# EAGLE board RP2040_Thing_Plus-Panel (EAGLE 9.6.2), part 1 of 6
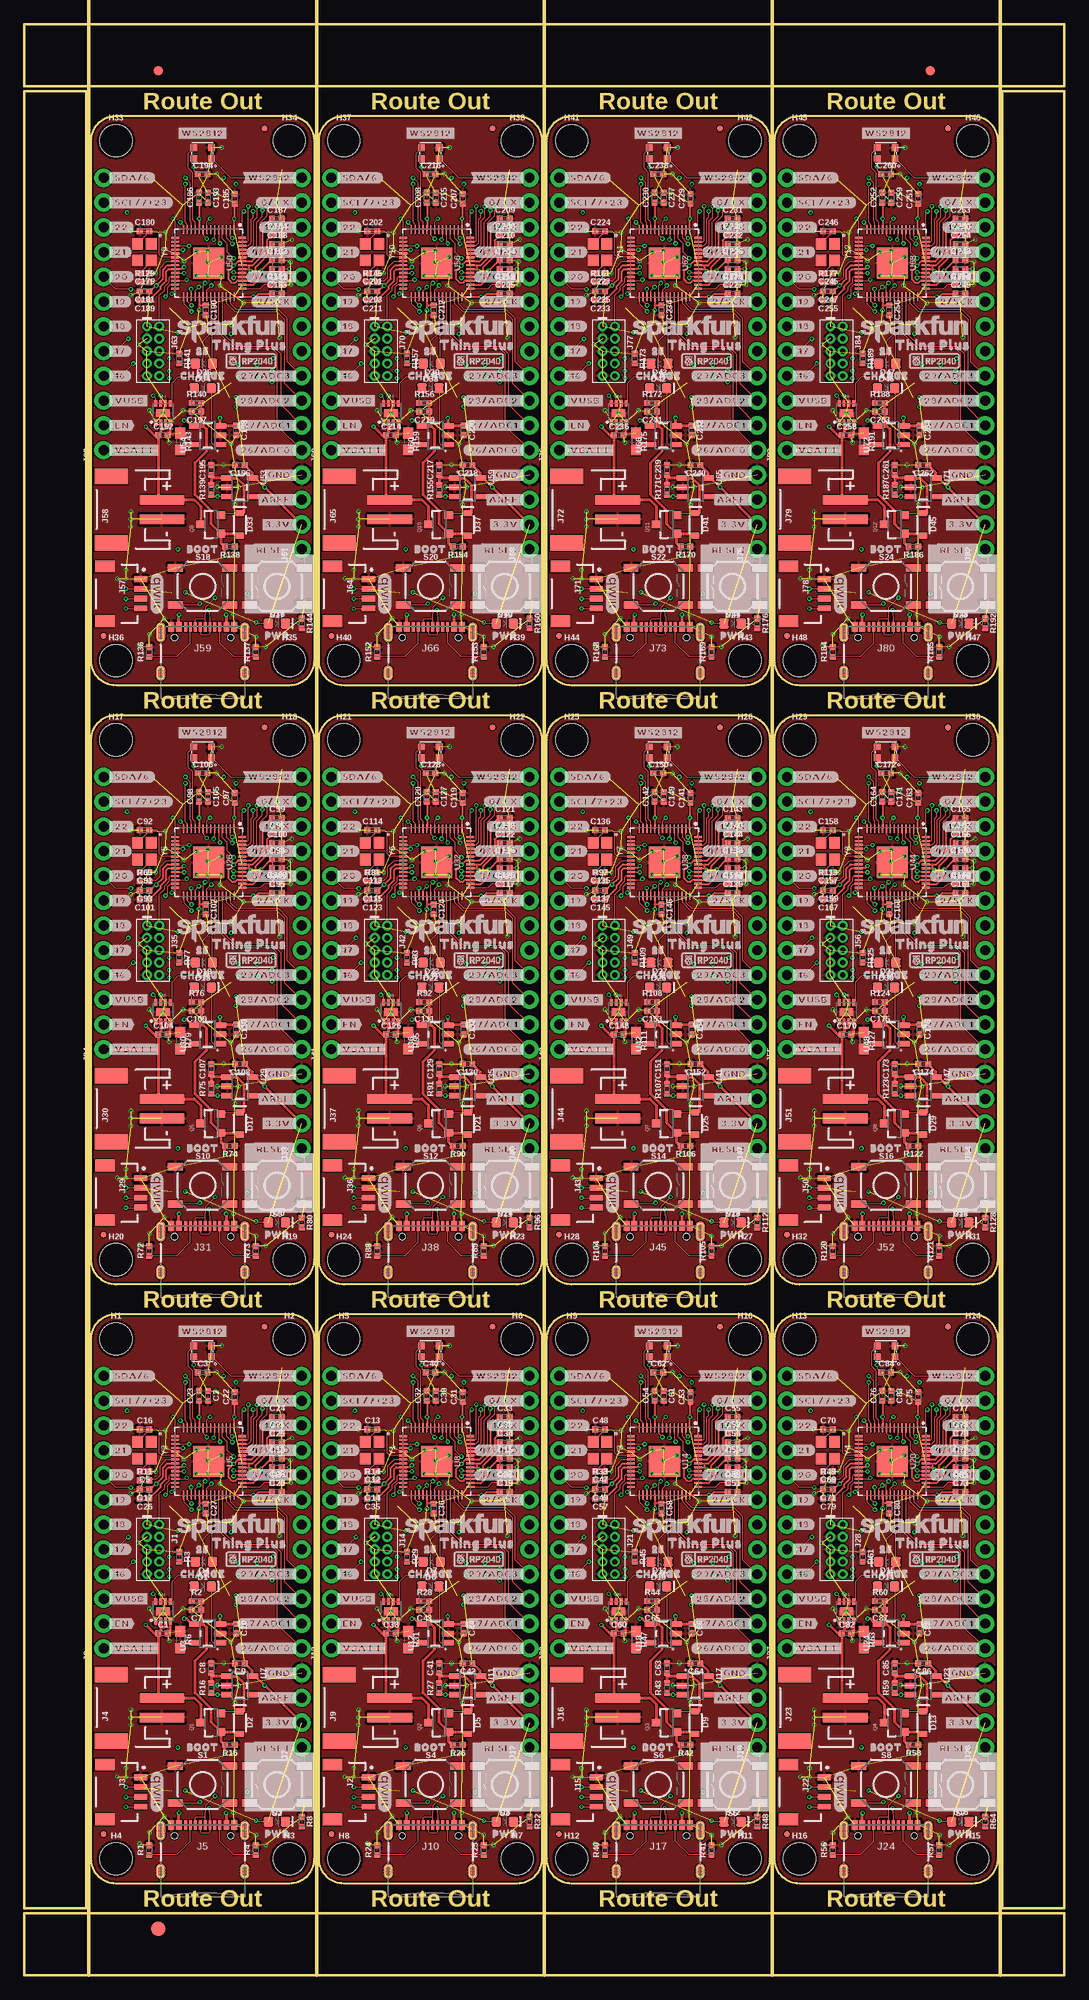
[diagram p0: board, top side]
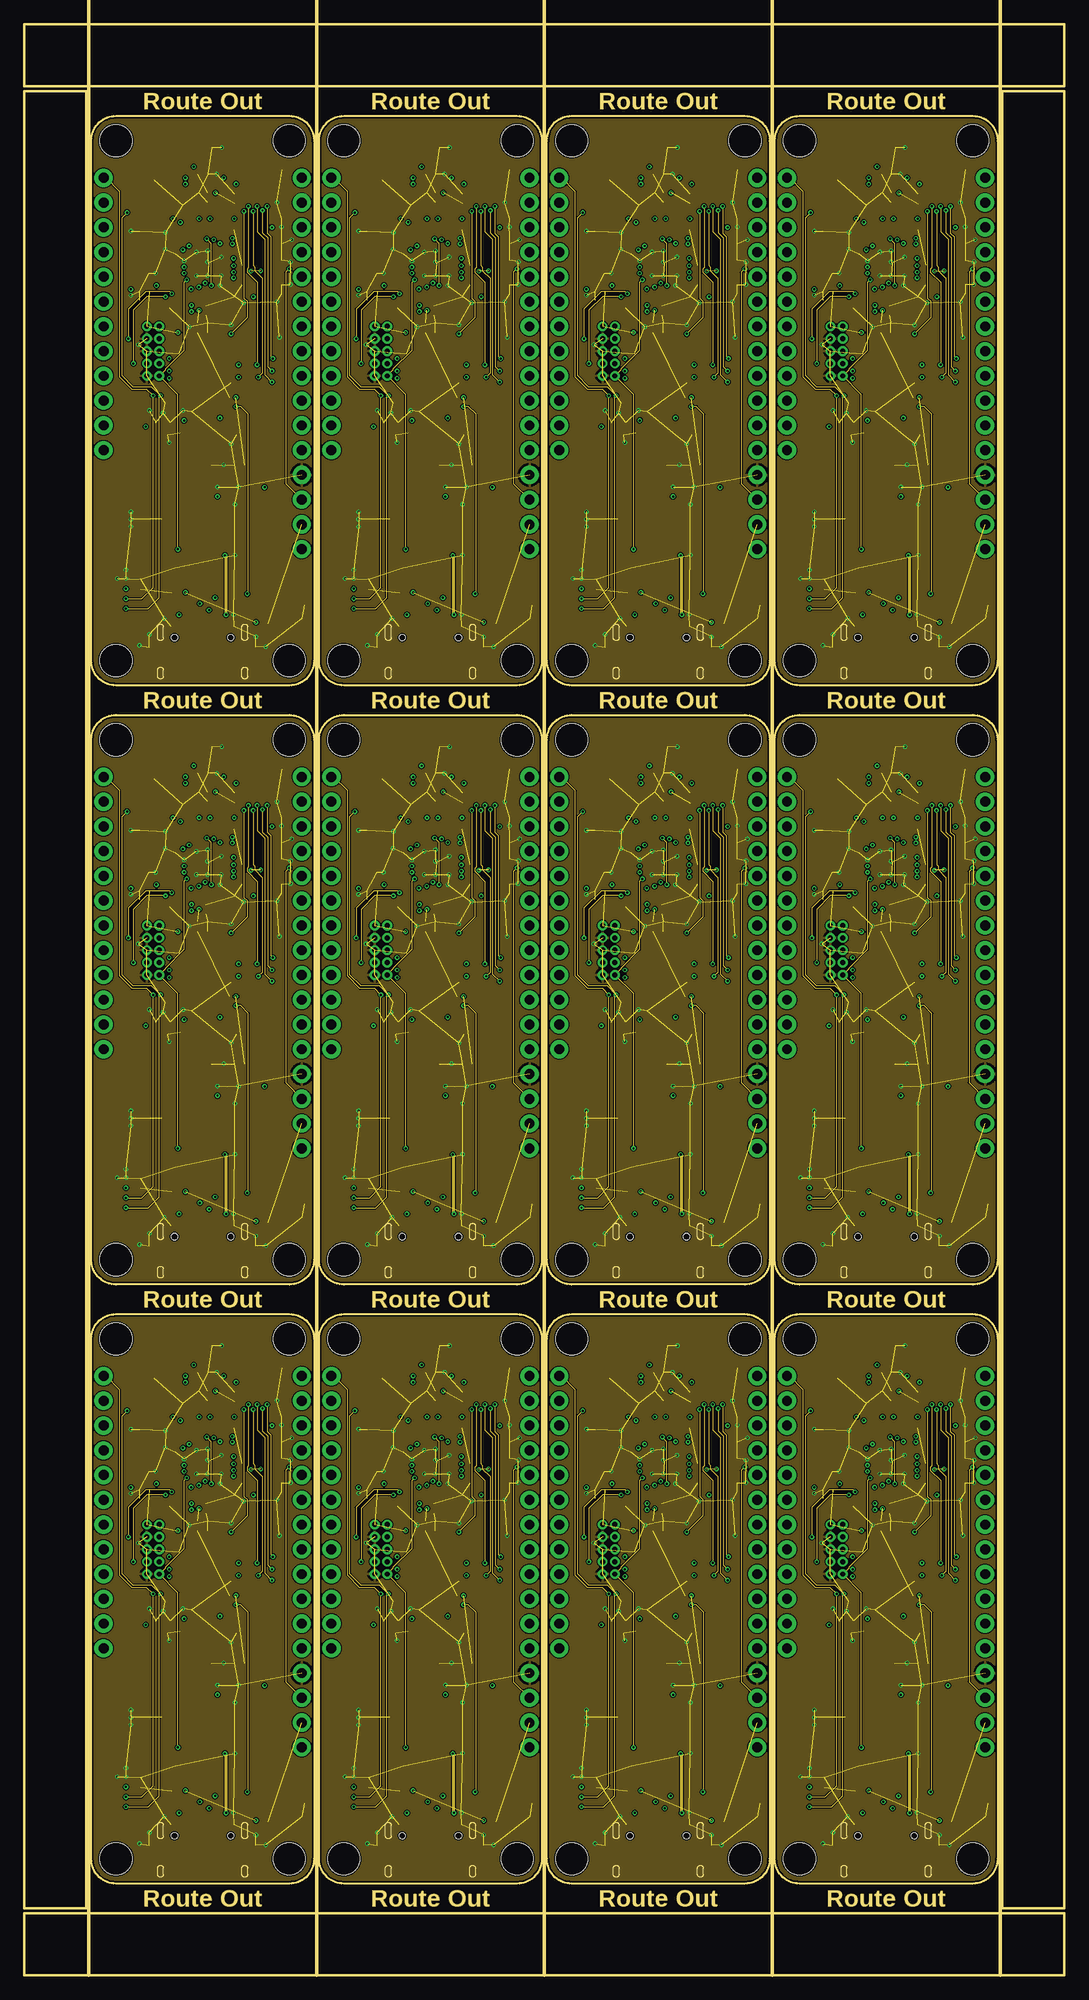
[diagram p1: board, inner layer Route2]
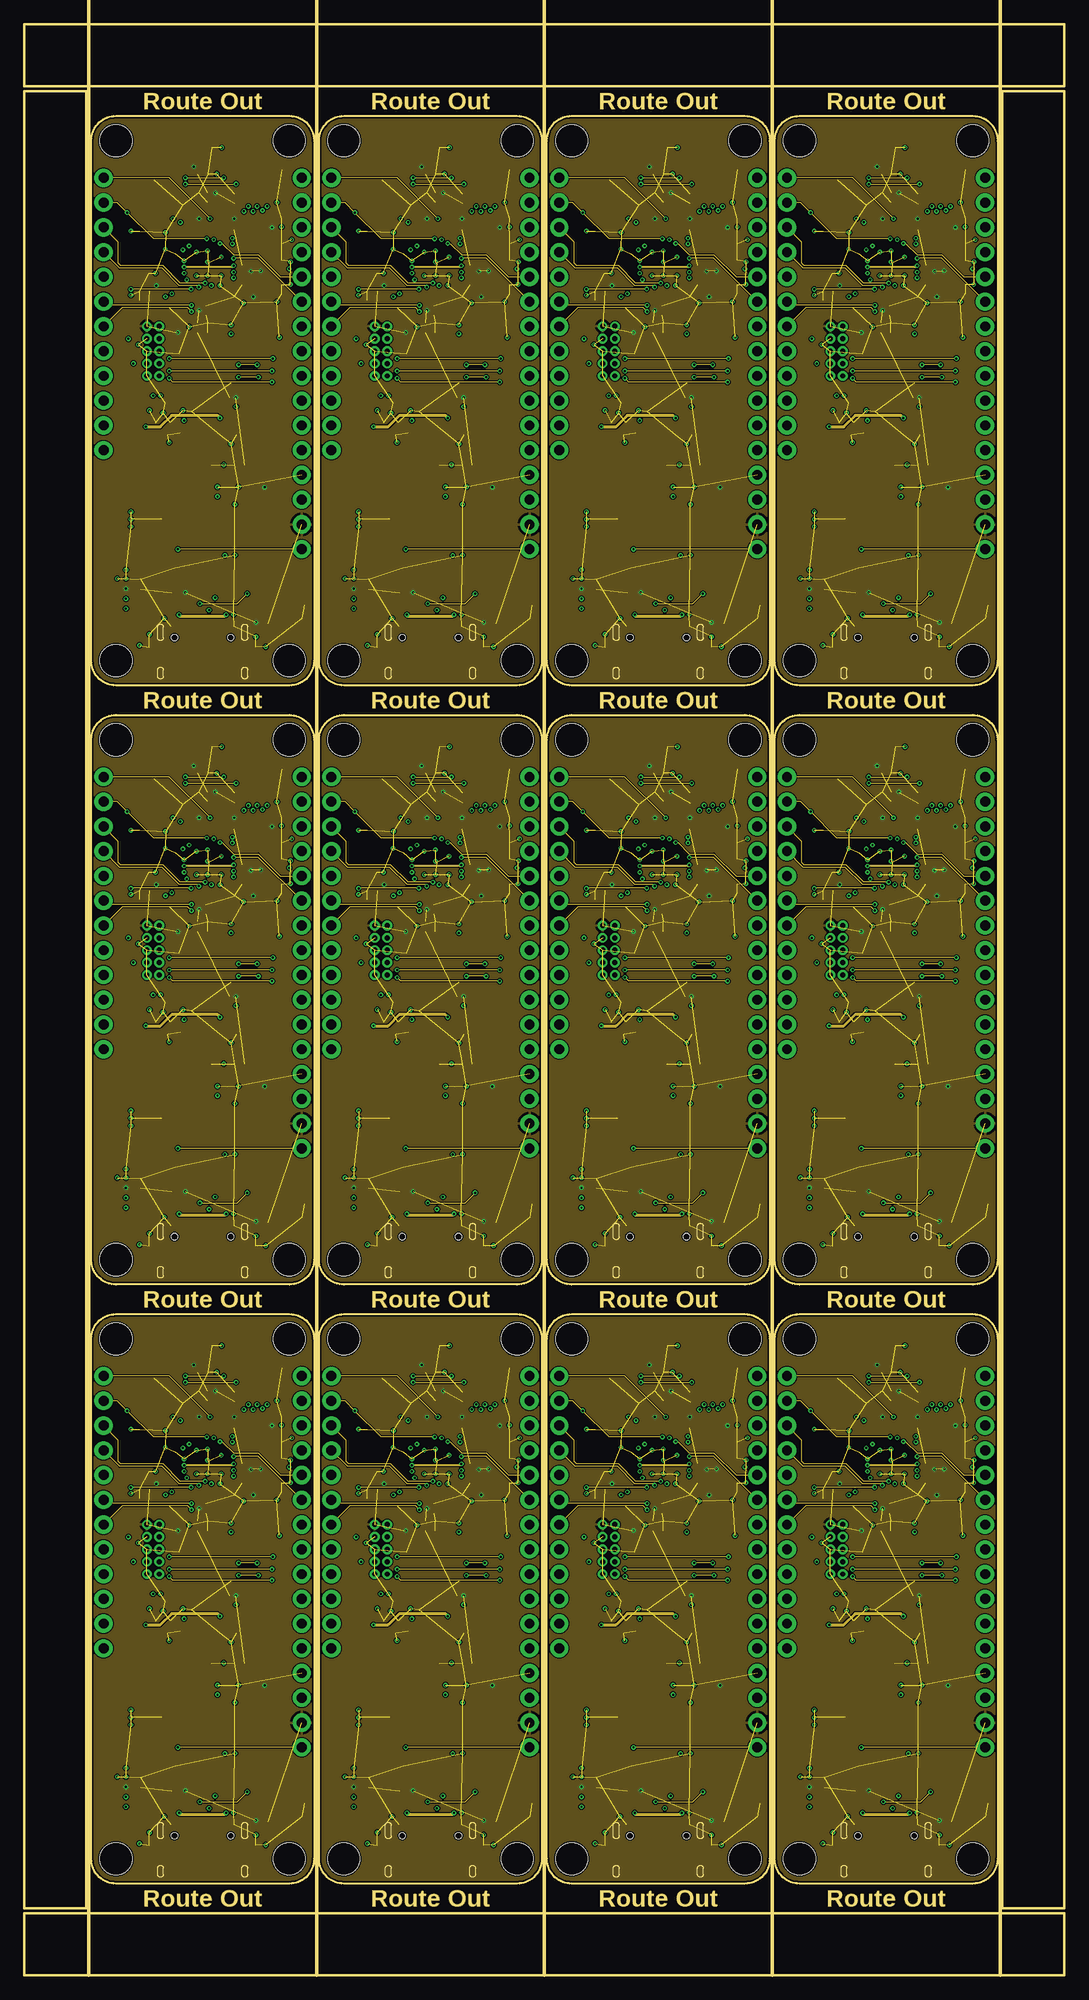
[diagram p2: board, inner layer Route15]
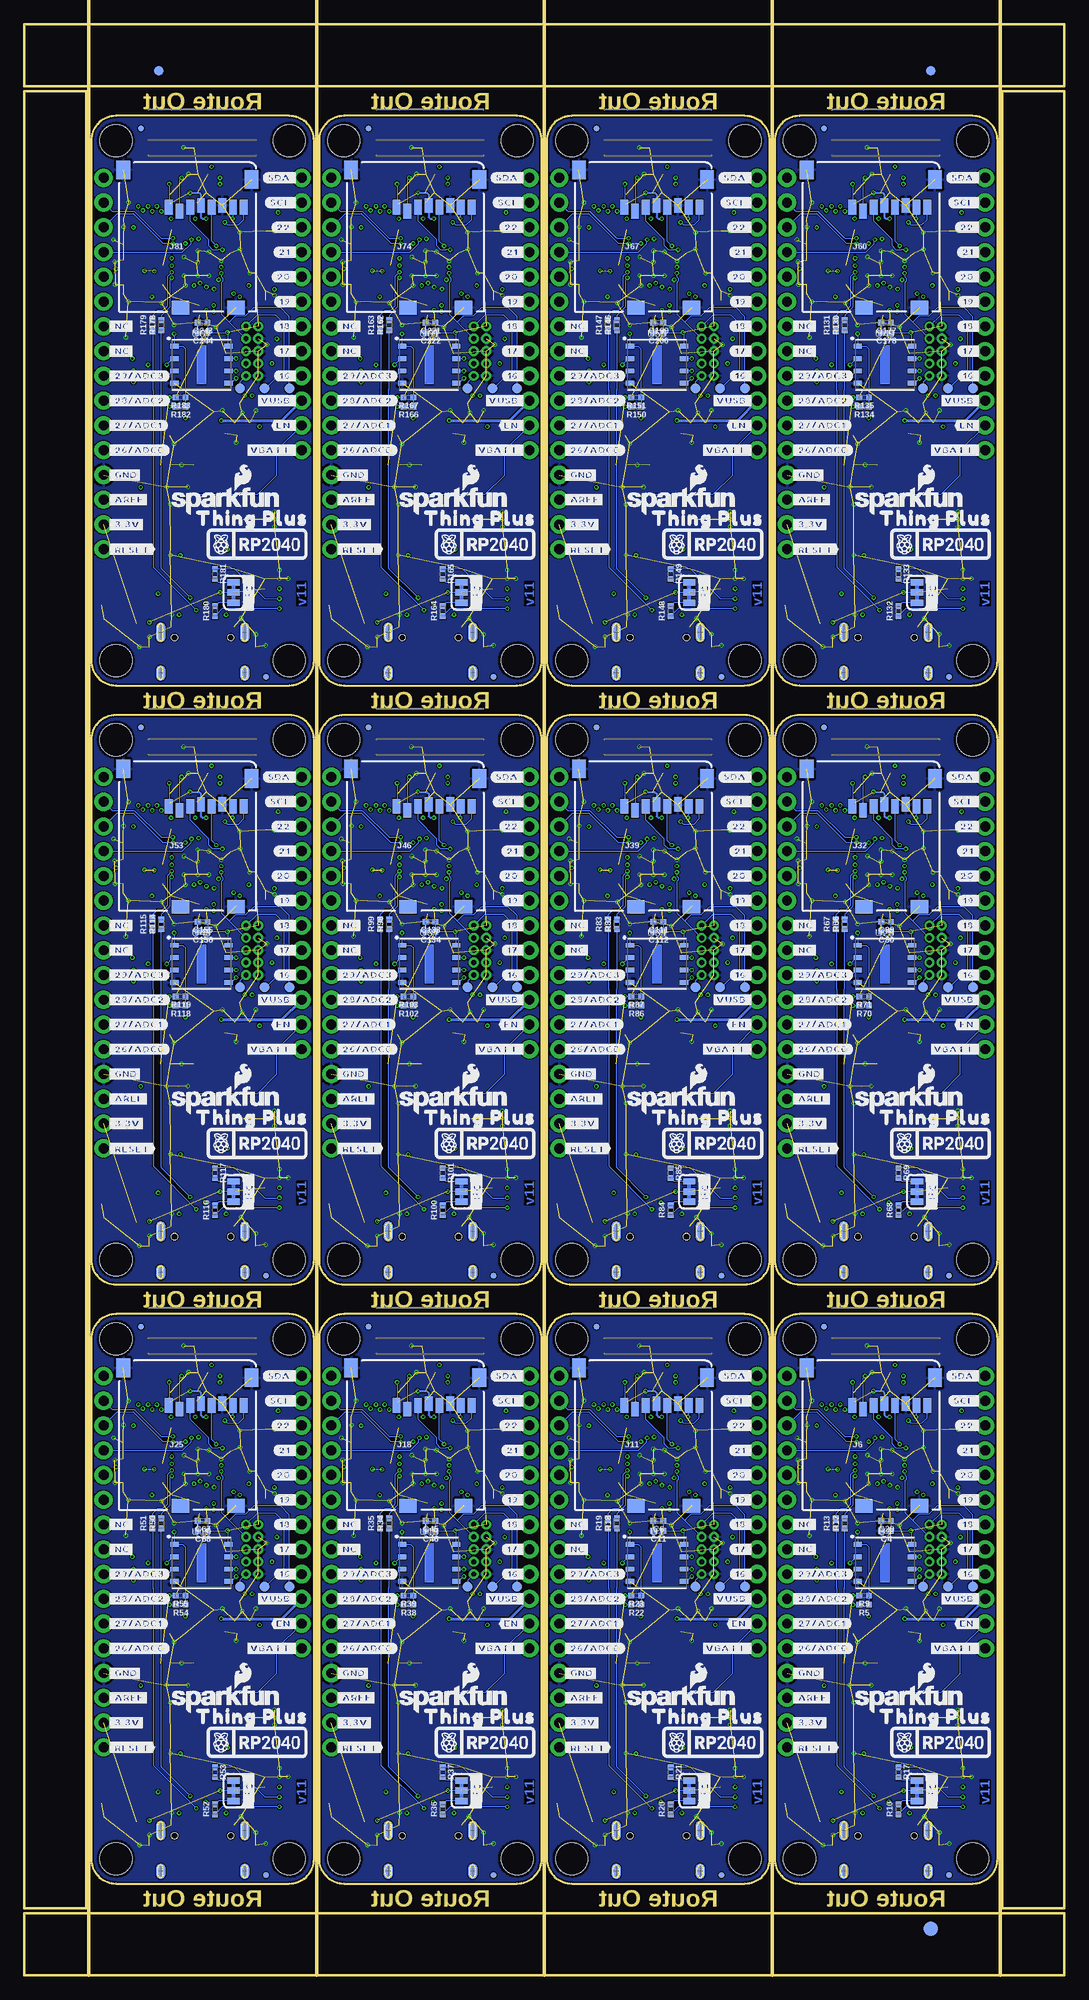
[diagram p3: board, bottom side, seen from below]

Size 106.68 x 200.15 mm. Coordinates in mm from the lower left corner, seen from the top.
Outline: 9.4,67.82 27.18,67.82 arc-90 29.72,65.28 29.72,11.94 arc-90 27.18,9.4 9.4,9.4 arc-90 6.86,11.94 6.86,65.28 arc-90 9.4,67.82
Outline: 32.77,67.82 50.55,67.82 arc-90 53.09,65.28 53.09,11.94 arc-90 50.55,9.4 32.77,9.4 arc-90 30.23,11.94 30.23,65.28 arc-90 32.77,67.82
Outline: 56.13,67.82 73.91,67.82 arc-90 76.45,65.28 76.45,11.94 arc-90 73.91,9.4 56.13,9.4 arc-90 53.59,11.94 53.59,65.28 arc-90 56.13,67.82
Outline: 79.5,67.82 97.28,67.82 arc-90 99.82,65.28 99.82,11.94 arc-90 97.28,9.4 79.5,9.4 arc-90 76.96,11.94 76.96,65.28 arc-90 79.5,67.82
Outline: 9.4,129.29 27.18,129.29 arc-90 29.72,126.75 29.72,73.41 arc-90 27.18,70.87 9.4,70.87 arc-90 6.86,73.41 6.86,126.75 arc-90 9.4,129.29
Outline: 32.77,129.29 50.55,129.29 arc-90 53.09,126.75 53.09,73.41 arc-90 50.55,70.87 32.77,70.87 arc-90 30.23,73.41 30.23,126.75 arc-90 32.77,129.29
Outline: 56.13,129.29 73.91,129.29 arc-90 76.45,126.75 76.45,73.41 arc-90 73.91,70.87 56.13,70.87 arc-90 53.59,73.41 53.59,126.75 arc-90 56.13,129.29
Outline: 79.5,129.29 97.28,129.29 arc-90 99.82,126.75 99.82,73.41 arc-90 97.28,70.87 79.5,70.87 arc-90 76.96,73.41 76.96,126.75 arc-90 79.5,129.29
Outline: 9.4,190.75 27.18,190.75 arc-90 29.72,188.21 29.72,134.87 arc-90 27.18,132.33 9.4,132.33 arc-90 6.86,134.87 6.86,188.21 arc-90 9.4,190.75
Outline: 32.77,190.75 50.55,190.75 arc-90 53.09,188.21 53.09,134.87 arc-90 50.55,132.33 32.77,132.33 arc-90 30.23,134.87 30.23,188.21 arc-90 32.77,190.75
Outline: 56.13,190.75 73.91,190.75 arc-90 76.45,188.21 76.45,134.87 arc-90 73.91,132.33 56.13,132.33 arc-90 53.59,134.87 53.59,188.21 arc-90 56.13,190.75
Outline: 79.5,190.75 97.28,190.75 arc-90 99.82,188.21 99.82,134.87 arc-90 97.28,132.33 79.5,132.33 arc-90 76.96,134.87 76.96,188.21 arc-90 79.5,190.75
Outline: 0,6.35 106.68,6.35 106.68,0 0,0 0,6.35
Outline: 100.33,193.29 106.68,193.29 106.68,6.86 100.33,6.86 100.33,193.29
Outline: 0,200.15 106.68,200.15 106.68,193.8 0,193.8 0,200.15
Outline: 0,193.29 6.35,193.29 6.35,6.86 0,6.86 0,193.29
Copper layers (1+2*15+16): Top 0.035mm / dielectric 1.5mm / Route2 0.035mm / dielectric 0.15mm / Route15 0.035mm / dielectric 0.2mm / Bottom 0.035mm
Design rules "RP2040_Thing_Plus": minimum track width 4mil, minimum drill 0.2mm, track to track 4mil, track to pad 4mil, pad to pad 4mil, via to via 4mil, smd to smd 4mil, copper to edge 6mil, drill to drill 6mil, minimum pad ring 3mil, minimum via ring 3mil, stop-mask expansion 4mil, vias tented up to drill 25mil, thermal gap 10mil
Net classes: 0 default: width 0 mm, drill 0 mm; 2 Clock: width 0.089 mm, clearance 0.178 mm
Milling: 5 lines

## Footprints (pad centres in the part's own frame; a part is rotated, then mirrored left to right if it is on the bottom)
0402-TIGHT = smd 0.6 x 0.6: 1 -0.5,0; 2 0.5,0
LED-0603 = smd 1 x 1: A -0.877,0; C 0.877,0
SOD-323 = smd 0.63 x 0.83: A 1.15,0; C -1.15,0
FIDUCIAL-1X2 = smd 1 x 1: 1 0,0
FIDUCIAL-1.5X3 = smd 1.5 x 1.5: 1 0,0
FIDUCIAL-MICRO = smd 0.635 x 0.635: 1 0,0
STAND-OFF = hole 3.302: 0,0
2X5-PTH-1.27MM = drill 0.508 pad 1: 1 -2.54,-0.635; 2 -2.54,0.635; 3 -1.27,-0.635; 4 -1.27,0.635; 5 0,-0.635; 6 0,0.635; 7 1.27,-0.635; 8 1.27,0.635; 9 2.54,-0.635; 10 2.54,0.635
JST04_1MM_RA = smd 0.6 x 1.35: 1 -1.5,0; 2 -0.5,0; 3 0.5,0; 4 1.5,0 | smd 1.2 x 2: NC1 2.8,-3.675; NC2 -2.8,-3.675
JST-2-SMD = smd 1 x 4.6: 1 -1,-3.7; 2 1,-3.7 | smd 1.6 x 3.4: NC1 -3.4,1.5; NC2 3.4,1.5
USB-C-16P-4LAYER-ISOLATED = smd 0.3 x 1: A5 -1.25,-0.34; A6 -0.25,-0.34; A7 0.25,-0.34; A8 1.25,-0.34; B5 1.75,-0.34; B6 0.75,-0.34; B7 -0.75,-0.34; B8 -1.75,-0.34 | smd 0.6 x 1: GND -3.225,-0.34; GND2 3.225,-0.34; VBUS1 -2.45,-0.34; VBUS2 2.45,-0.34 | smd 1 x 2.1: SHLD1 -4.32,-0.915; SHLD2 4.32,-0.915 | smd 1 x 2.1 bottom: SHLD3 -4.32,-0.915; SHLD4 4.32,-0.915 | smd 1 x 1.6: SHLD5 -4.32,-5.095; SHLD8 4.32,-5.095 | smd 1 x 1.6 bottom: SHLD6 -4.32,-5.095; SHLD7 4.32,-5.095 | hole 0.65: -2.89,-1.445; 2.89,-1.445
MICRO-SD-SOCKET = smd 1.8 x 1.4: CD1 -2.05,0.4; CD2 -7.75,0.4 | smd 0.8 x 1.5: CS/DAT3 -7.84,10.3; DAT1 -1.24,10.7; DAT2 -8.94,10.7; DI/CMD -6.74,10.7; DO/DAT0 -2.34,10.7; GND -3.44,10.9; SCLK -4.54,10.7; VCC -5.64,10.9 | smd 1.4 x 1.9: GND1 -13.6,14.55; GND3 -0.45,13.55
1X16_NO_SILK = drill 1.016 pad 1.88: 1 0,0; 2 2.54,0; 3 5.08,0; 4 7.62,0; 5 10.16,0; 6 12.7,0; 7 15.24,0; 8 17.78,0; 9 20.32,0; 10 22.86,0; 11 25.4,0; 12 27.94,0; 13 30.48,0; 14 33.02,0; 15 35.56,0; 16 38.1,0
1X12_NO_SILK = drill 1.016 pad 1.88: 1 0,0; 2 2.54,0; 3 5.08,0; 4 7.62,0; 5 10.16,0; 6 12.7,0; 7 15.24,0; 8 17.78,0; 9 20.32,0; 10 22.86,0; 11 25.4,0; 12 27.94,0
SMT-JUMPER_3_2-NC_TRACE_SILK = smd 0.66 x 1.27: 1 -1.041,0; 2 0,0; 3 1.041,0
SOT23-3 = smd 0.8 x 0.9: 1 -0.95,-1; 2 0.95,-1; 3 0,1.1
0603 = smd 1.1 x 1: 1 -0.85,0; 2 0.85,0
TACTILE_SWITCH_SMD_5.2MM = smd 1.524 x 0.762: 1 -2.794,1.905; 2 2.794,1.905; 3 -2.794,-1.905; 4 2.794,-1.905
PAD.03X.04 = smd 1.016 x 1.016: P$1 0,0
WSON-8-6X5-SKINNY_CENTERPAD = smd 0.85 x 0.5: 1 -2.775,1.905; 2 -2.775,0.635; 3 -2.775,-0.635; 4 -2.775,-1.905; 5 2.775,-1.905; 6 2.775,-0.635; 7 2.775,0.635; 8 2.775,1.905
DFN-8 = smd 0.3 x 0.7: 1 -0.75,-0.99; 2 -0.25,-0.99; 3 0.25,-0.99; 4 0.75,-0.99; 5 0.75,0.99; 6 0.25,0.99; 7 -0.25,0.99; 8 -0.75,0.99 | smd 1.38 x 0.8: 9 0,0
SOT23-5 = smd 0.55 x 1.2: 1 -0.95,-1.3; 2 0,-1.3; 3 0.95,-1.3; 4 0.95,1.3; 5 -0.95,1.3
QFN-56 = smd 0.875 x 0.2: 1 -3.437,2.6; 2 -3.437,2.2; 3 -3.437,1.8; 4 -3.437,1.4; 5 -3.437,1; 6 -3.437,0.6; 7 -3.437,0.2; 8 -3.437,-0.2; 9 -3.437,-0.6; 10 -3.437,-1; 11 -3.437,-1.4; 12 -3.437,-1.8; 13 -3.437,-2.2; 14 -3.437,-2.6; 29 3.437,-2.6; 30 3.437,-2.2; 31 3.437,-1.8; 32 3.437,-1.4; 33 3.437,-1; 34 3.437,-0.6; 35 3.437,-0.2; 36 3.437,0.2; 37 3.437,0.6; 38 3.437,1; 39 3.437,1.4; 40 3.437,1.8; 41 3.437,2.2; 42 3.437,2.6 | smd 0.2 x 0.875: 15 -2.6,-3.437; 16 -2.2,-3.437; 17 -1.8,-3.437; 18 -1.4,-3.437; 19 -1,-3.437; 20 -0.6,-3.437; 21 -0.2,-3.437; 22 0.2,-3.437; 23 0.6,-3.437; 24 1,-3.437; 25 1.4,-3.437; 26 1.8,-3.437; 27 2.2,-3.437; 28 2.6,-3.437; 43 2.6,3.437; 44 2.2,3.437; 45 1.8,3.437; 46 1.4,3.437; 47 1,3.437; 48 0.6,3.437; 49 0.2,3.437; 50 -0.2,3.437; 51 -0.6,3.437; 52 -1,3.437; 53 -1.4,3.437; 54 -1.8,3.437; 55 -2.2,3.437; 56 -2.6,3.437 | smd 3.2 x 3.2: EPAD 0,0
WS2812-2020 = smd 0.7 x 0.7: 1 0.915,-0.55; 2 0.915,0.55; 3 -0.915,0.55; 4 -0.915,-0.55
CRYSTAL-SMD-2X2.5MM = smd 1.2 x 1.1: P1 0.846,0.69; P2 -0.854,0.69; P3 -0.854,-0.71; P4 0.846,-0.71

## Placement (x,y rotation side)
C1  0.1uF  [0402-TIGHT]  14.22,35.05 0 top
C2  0.1uF  [0402-TIGHT]  18.83,59.44 270 top
C3  0.1uF  [0402-TIGHT]  18.29,61.85 0 top
C4  2.2uF  [0402-TIGHT]  18.29,45.59 180 bottom
C5  15pF  [0402-TIGHT]  12.32,51.69 180 top
C6  0.1uF  [0402-TIGHT]  41.66,46.61 180 bottom
C7  4.7uF  [0402-TIGHT]  17.65,37.47 180 top
C8  1.0uF  [0402-TIGHT]  19.18,31.5 90 top
C9  2.2uF  [0402-TIGHT]  22.1,32 180 top
C10  4.7uF  [0402-TIGHT]  21.72,35.56 270 top
C11  2.2uF  [0402-TIGHT]  41.66,45.59 180 bottom
C12  15pF  [0402-TIGHT]  35.69,51.69 180 top
C13  15pF  [0402-TIGHT]  35.69,56.01 0 top
C14  0.1uF  [0402-TIGHT]  35.69,49.82 180 top
C15  0.1uF  [0402-TIGHT]  49.28,53.02 0 top
C16  15pF  [0402-TIGHT]  12.32,56.01 0 top
C17  0.1uF  [0402-TIGHT]  12.32,49.82 180 top
C18  0.1uF  [0402-TIGHT]  25.91,53.02 0 top
C19  0.1uF  [0402-TIGHT]  49.28,49.58 0 top
C20  0.1uF  [0402-TIGHT]  25.91,49.58 0 top
C21  0.1uF  [0402-TIGHT]  25.91,55.59 0 top
C22  0.1uF  [0402-TIGHT]  21.59,59.31 90 top
C23  0.1uF  [0402-TIGHT]  17.91,59.44 90 top
C24  0.1uF  [0402-TIGHT]  25.91,57.28 0 top
C25  0.1uF  [0402-TIGHT]  25.91,54.67 0 top
C26  2.2uF  [0402-TIGHT]  12.32,48.89 180 top
C27  2.2uF  [0402-TIGHT]  18.62,47.88 270 top
C28  2.2uF  [0402-TIGHT]  25.91,50.5 0 top
C29  0.1uF  [0402-TIGHT]  18.29,46.61 180 bottom
C30  0.1uF  [0402-TIGHT]  49.28,55.59 0 top
C31  0.1uF  [0402-TIGHT]  44.96,59.31 90 top
C32  0.1uF  [0402-TIGHT]  41.27,59.44 90 top
C33  0.1uF  [0402-TIGHT]  49.28,57.28 0 top
C34  0.1uF  [0402-TIGHT]  49.28,54.67 0 top
C35  2.2uF  [0402-TIGHT]  35.69,48.89 180 top
C36  2.2uF  [0402-TIGHT]  41.99,47.88 270 top
C37  2.2uF  [0402-TIGHT]  49.28,50.5 0 top
C38  0.1uF  [0402-TIGHT]  37.59,35.05 0 top
C39  0.1uF  [0402-TIGHT]  42.2,59.44 270 top
C40  0.1uF  [0402-TIGHT]  41.66,61.85 0 top
C41  1.0uF  [0402-TIGHT]  42.54,31.5 90 top
C42  2.2uF  [0402-TIGHT]  45.47,32 180 top
C43  4.7uF  [0402-TIGHT]  41.02,37.47 180 top
C44  4.7uF  [0402-TIGHT]  45.08,35.56 270 top
C45  0.1uF  [0402-TIGHT]  65.02,46.61 180 bottom
C46  2.2uF  [0402-TIGHT]  65.02,45.59 180 bottom
C47  15pF  [0402-TIGHT]  59.05,51.69 180 top
C48  15pF  [0402-TIGHT]  59.05,56.01 0 top
C49  0.1uF  [0402-TIGHT]  59.05,49.82 180 top
C50  0.1uF  [0402-TIGHT]  72.64,53.02 0 top
C51  0.1uF  [0402-TIGHT]  72.64,49.58 0 top
C52  0.1uF  [0402-TIGHT]  72.64,55.59 0 top
C53  0.1uF  [0402-TIGHT]  68.33,59.31 90 top
C54  0.1uF  [0402-TIGHT]  64.64,59.44 90 top
C55  0.1uF  [0402-TIGHT]  72.64,57.28 0 top
C56  0.1uF  [0402-TIGHT]  72.64,54.67 0 top
C57  2.2uF  [0402-TIGHT]  59.05,48.89 180 top
C58  2.2uF  [0402-TIGHT]  65.35,47.88 270 top
C59  2.2uF  [0402-TIGHT]  72.64,50.5 0 top
C60  0.1uF  [0402-TIGHT]  60.96,35.05 0 top
C61  0.1uF  [0402-TIGHT]  65.57,59.44 270 top
C62  0.1uF  [0402-TIGHT]  65.02,61.85 0 top
C63  1.0uF  [0402-TIGHT]  65.91,31.5 90 top
C64  2.2uF  [0402-TIGHT]  68.83,32 180 top
C65  4.7uF  [0402-TIGHT]  64.39,37.47 180 top
C66  4.7uF  [0402-TIGHT]  68.45,35.56 270 top
C67  0.1uF  [0402-TIGHT]  88.39,46.61 180 bottom
C68  2.2uF  [0402-TIGHT]  88.39,45.59 180 bottom
C69  15pF  [0402-TIGHT]  82.42,51.69 180 top
C70  15pF  [0402-TIGHT]  82.42,56.01 0 top
C71  0.1uF  [0402-TIGHT]  82.42,49.82 180 top
C72  0.1uF  [0402-TIGHT]  96.01,53.02 0 top
C73  0.1uF  [0402-TIGHT]  96.01,49.58 0 top
C74  0.1uF  [0402-TIGHT]  96.01,55.59 0 top
C75  0.1uF  [0402-TIGHT]  91.69,59.31 90 top
C76  0.1uF  [0402-TIGHT]  88.01,59.44 90 top
C77  0.1uF  [0402-TIGHT]  96.01,57.28 0 top
C78  0.1uF  [0402-TIGHT]  96.01,54.67 0 top
C79  2.2uF  [0402-TIGHT]  82.42,48.89 180 top
C80  2.2uF  [0402-TIGHT]  88.72,47.88 270 top
C81  2.2uF  [0402-TIGHT]  96.01,50.5 0 top
C82  0.1uF  [0402-TIGHT]  84.33,35.05 0 top
C83  0.1uF  [0402-TIGHT]  88.94,59.44 270 top
C84  0.1uF  [0402-TIGHT]  88.39,61.85 0 top
C85  1.0uF  [0402-TIGHT]  89.28,31.5 90 top
C86  2.2uF  [0402-TIGHT]  92.2,32 180 top
C87  4.7uF  [0402-TIGHT]  87.76,37.47 180 top
C88  4.7uF  [0402-TIGHT]  91.82,35.56 270 top
C89  0.1uF  [0402-TIGHT]  18.29,108.08 180 bottom
C90  2.2uF  [0402-TIGHT]  18.29,107.06 180 bottom
C91  15pF  [0402-TIGHT]  12.32,113.16 180 top
C92  15pF  [0402-TIGHT]  12.32,117.47 0 top
C93  0.1uF  [0402-TIGHT]  12.32,111.29 180 top
C94  0.1uF  [0402-TIGHT]  25.91,114.49 0 top
C95  0.1uF  [0402-TIGHT]  25.91,111.05 0 top
C96  0.1uF  [0402-TIGHT]  25.91,117.06 0 top
C97  0.1uF  [0402-TIGHT]  21.59,120.78 90 top
C98  0.1uF  [0402-TIGHT]  17.91,120.9 90 top
C99  0.1uF  [0402-TIGHT]  25.91,118.74 0 top
C100  0.1uF  [0402-TIGHT]  25.91,116.14 0 top
C101  2.2uF  [0402-TIGHT]  12.32,110.36 180 top
C102  2.2uF  [0402-TIGHT]  18.62,109.35 270 top
C103  2.2uF  [0402-TIGHT]  25.91,111.96 0 top
C104  0.1uF  [0402-TIGHT]  14.22,96.52 0 top
C105  0.1uF  [0402-TIGHT]  18.83,120.9 270 top
C106  0.1uF  [0402-TIGHT]  18.29,123.32 0 top
C107  1.0uF  [0402-TIGHT]  19.18,92.96 90 top
C108  2.2uF  [0402-TIGHT]  22.1,93.47 180 top
C109  4.7uF  [0402-TIGHT]  17.65,98.93 180 top
C110  4.7uF  [0402-TIGHT]  21.72,97.03 270 top
C111  0.1uF  [0402-TIGHT]  41.66,108.08 180 bottom
C112  2.2uF  [0402-TIGHT]  41.66,107.06 180 bottom
C113  15pF  [0402-TIGHT]  35.69,113.16 180 top
C114  15pF  [0402-TIGHT]  35.69,117.47 0 top
C115  0.1uF  [0402-TIGHT]  35.69,111.29 180 top
C116  0.1uF  [0402-TIGHT]  49.28,114.49 0 top
C117  0.1uF  [0402-TIGHT]  49.28,111.05 0 top
C118  0.1uF  [0402-TIGHT]  49.28,117.06 0 top
C119  0.1uF  [0402-TIGHT]  44.96,120.78 90 top
C120  0.1uF  [0402-TIGHT]  41.27,120.9 90 top
C121  0.1uF  [0402-TIGHT]  49.28,118.74 0 top
C122  0.1uF  [0402-TIGHT]  49.28,116.14 0 top
C123  2.2uF  [0402-TIGHT]  35.69,110.36 180 top
C124  2.2uF  [0402-TIGHT]  41.99,109.35 270 top
C125  2.2uF  [0402-TIGHT]  49.28,111.96 0 top
C126  0.1uF  [0402-TIGHT]  37.59,96.52 0 top
C127  0.1uF  [0402-TIGHT]  42.2,120.9 270 top
C128  0.1uF  [0402-TIGHT]  41.66,123.32 0 top
C129  1.0uF  [0402-TIGHT]  42.54,92.96 90 top
C130  2.2uF  [0402-TIGHT]  45.47,93.47 180 top
C131  4.7uF  [0402-TIGHT]  41.02,98.93 180 top
C132  4.7uF  [0402-TIGHT]  45.08,97.03 270 top
C133  0.1uF  [0402-TIGHT]  65.02,108.08 180 bottom
C134  2.2uF  [0402-TIGHT]  65.02,107.06 180 bottom
C135  15pF  [0402-TIGHT]  59.05,113.16 180 top
C136  15pF  [0402-TIGHT]  59.05,117.47 0 top
C137  0.1uF  [0402-TIGHT]  59.05,111.29 180 top
C138  0.1uF  [0402-TIGHT]  72.64,114.49 0 top
C139  0.1uF  [0402-TIGHT]  72.64,111.05 0 top
C140  0.1uF  [0402-TIGHT]  72.64,117.06 0 top
C141  0.1uF  [0402-TIGHT]  68.33,120.78 90 top
C142  0.1uF  [0402-TIGHT]  64.64,120.9 90 top
C143  0.1uF  [0402-TIGHT]  72.64,118.74 0 top
C144  0.1uF  [0402-TIGHT]  72.64,116.14 0 top
C145  2.2uF  [0402-TIGHT]  59.05,110.36 180 top
C146  2.2uF  [0402-TIGHT]  65.35,109.35 270 top
C147  2.2uF  [0402-TIGHT]  72.64,111.96 0 top
C148  0.1uF  [0402-TIGHT]  60.96,96.52 0 top
C149  0.1uF  [0402-TIGHT]  65.57,120.9 270 top
C150  0.1uF  [0402-TIGHT]  65.02,123.32 0 top
C151  1.0uF  [0402-TIGHT]  65.91,92.96 90 top
C152  2.2uF  [0402-TIGHT]  68.83,93.47 180 top
C153  4.7uF  [0402-TIGHT]  64.39,98.93 180 top
C154  4.7uF  [0402-TIGHT]  68.45,97.03 270 top
C155  0.1uF  [0402-TIGHT]  88.39,108.08 180 bottom
C156  2.2uF  [0402-TIGHT]  88.39,107.06 180 bottom
C157  15pF  [0402-TIGHT]  82.42,113.16 180 top
C158  15pF  [0402-TIGHT]  82.42,117.47 0 top
C159  0.1uF  [0402-TIGHT]  82.42,111.29 180 top
C160  0.1uF  [0402-TIGHT]  96.01,114.49 0 top
C161  0.1uF  [0402-TIGHT]  96.01,111.05 0 top
C162  0.1uF  [0402-TIGHT]  96.01,117.06 0 top
C163  0.1uF  [0402-TIGHT]  91.69,120.78 90 top
C164  0.1uF  [0402-TIGHT]  88.01,120.9 90 top
C165  0.1uF  [0402-TIGHT]  96.01,118.74 0 top
C166  0.1uF  [0402-TIGHT]  96.01,116.14 0 top
C167  2.2uF  [0402-TIGHT]  82.42,110.36 180 top
C168  2.2uF  [0402-TIGHT]  88.72,109.35 270 top
C169  2.2uF  [0402-TIGHT]  96.01,111.96 0 top
C170  0.1uF  [0402-TIGHT]  84.33,96.52 0 top
C171  0.1uF  [0402-TIGHT]  88.94,120.9 270 top
C172  0.1uF  [0402-TIGHT]  88.39,123.32 0 top
C173  1.0uF  [0402-TIGHT]  89.28,92.96 90 top
C174  2.2uF  [0402-TIGHT]  92.2,93.47 180 top
C175  4.7uF  [0402-TIGHT]  87.76,98.93 180 top
C176  4.7uF  [0402-TIGHT]  91.82,97.03 270 top
C177  0.1uF  [0402-TIGHT]  18.29,169.54 180 bottom
C178  2.2uF  [0402-TIGHT]  18.29,168.53 180 bottom
C179  15pF  [0402-TIGHT]  12.32,174.62 180 top
C180  15pF  [0402-TIGHT]  12.32,178.94 0 top
C181  0.1uF  [0402-TIGHT]  12.32,172.76 180 top
C182  0.1uF  [0402-TIGHT]  25.91,175.96 0 top
C183  0.1uF  [0402-TIGHT]  25.91,172.52 0 top
C184  0.1uF  [0402-TIGHT]  25.91,178.52 0 top
C185  0.1uF  [0402-TIGHT]  21.59,182.25 90 top
C186  0.1uF  [0402-TIGHT]  17.91,182.37 90 top
C187  0.1uF  [0402-TIGHT]  25.91,180.21 0 top
C188  0.1uF  [0402-TIGHT]  25.91,177.61 0 top
C189  2.2uF  [0402-TIGHT]  12.32,171.83 180 top
C190  2.2uF  [0402-TIGHT]  18.62,170.81 270 top
C191  2.2uF  [0402-TIGHT]  25.91,173.43 0 top
C192  0.1uF  [0402-TIGHT]  14.22,157.99 0 top
C193  0.1uF  [0402-TIGHT]  18.83,182.37 270 top
C194  0.1uF  [0402-TIGHT]  18.29,184.78 0 top
C195  1.0uF  [0402-TIGHT]  19.18,154.43 90 top
C196  2.2uF  [0402-TIGHT]  22.1,154.94 180 top
C197  4.7uF  [0402-TIGHT]  17.65,160.4 180 top
C198  4.7uF  [0402-TIGHT]  21.72,158.5 270 top
C199  0.1uF  [0402-TIGHT]  41.66,169.54 180 bottom
C200  2.2uF  [0402-TIGHT]  41.66,168.53 180 bottom
C201  15pF  [0402-TIGHT]  35.69,174.62 180 top
C202  15pF  [0402-TIGHT]  35.69,178.94 0 top
C203  0.1uF  [0402-TIGHT]  35.69,172.76 180 top
C204  0.1uF  [0402-TIGHT]  49.28,175.96 0 top
C205  0.1uF  [0402-TIGHT]  49.28,172.52 0 top
C206  0.1uF  [0402-TIGHT]  49.28,178.52 0 top
C207  0.1uF  [0402-TIGHT]  44.96,182.25 90 top
C208  0.1uF  [0402-TIGHT]  41.27,182.37 90 top
C209  0.1uF  [0402-TIGHT]  49.28,180.21 0 top
C210  0.1uF  [0402-TIGHT]  49.28,177.61 0 top
C211  2.2uF  [0402-TIGHT]  35.69,171.83 180 top
C212  2.2uF  [0402-TIGHT]  41.99,170.81 270 top
C213  2.2uF  [0402-TIGHT]  49.28,173.43 0 top
C214  0.1uF  [0402-TIGHT]  37.59,157.99 0 top
C215  0.1uF  [0402-TIGHT]  42.2,182.37 270 top
C216  0.1uF  [0402-TIGHT]  41.66,184.78 0 top
C217  1.0uF  [0402-TIGHT]  42.54,154.43 90 top
C218  2.2uF  [0402-TIGHT]  45.47,154.94 180 top
C219  4.7uF  [0402-TIGHT]  41.02,160.4 180 top
C220  4.7uF  [0402-TIGHT]  45.08,158.5 270 top
C221  0.1uF  [0402-TIGHT]  65.02,169.54 180 bottom
C222  2.2uF  [0402-TIGHT]  65.02,168.53 180 bottom
C223  15pF  [0402-TIGHT]  59.05,174.62 180 top
C224  15pF  [0402-TIGHT]  59.05,178.94 0 top
C225  0.1uF  [0402-TIGHT]  59.05,172.76 180 top
C226  0.1uF  [0402-TIGHT]  72.64,175.96 0 top
C227  0.1uF  [0402-TIGHT]  72.64,172.52 0 top
C228  0.1uF  [0402-TIGHT]  72.64,178.52 0 top
C229  0.1uF  [0402-TIGHT]  68.33,182.25 90 top
C230  0.1uF  [0402-TIGHT]  64.64,182.37 90 top
C231  0.1uF  [0402-TIGHT]  72.64,180.21 0 top
C232  0.1uF  [0402-TIGHT]  72.64,177.61 0 top
C233  2.2uF  [0402-TIGHT]  59.05,171.83 180 top
C234  2.2uF  [0402-TIGHT]  65.35,170.81 270 top
C235  2.2uF  [0402-TIGHT]  72.64,173.43 0 top
C236  0.1uF  [0402-TIGHT]  60.96,157.99 0 top
C237  0.1uF  [0402-TIGHT]  65.57,182.37 270 top
C238  0.1uF  [0402-TIGHT]  65.02,184.78 0 top
C239  1.0uF  [0402-TIGHT]  65.91,154.43 90 top
C240  2.2uF  [0402-TIGHT]  68.83,154.94 180 top
C241  4.7uF  [0402-TIGHT]  64.39,160.4 180 top
C242  4.7uF  [0402-TIGHT]  68.45,158.5 270 top
C243  0.1uF  [0402-TIGHT]  88.39,169.54 180 bottom
C244  2.2uF  [0402-TIGHT]  88.39,168.53 180 bottom
C245  15pF  [0402-TIGHT]  82.42,174.62 180 top
C246  15pF  [0402-TIGHT]  82.42,178.94 0 top
C247  0.1uF  [0402-TIGHT]  82.42,172.76 180 top
C248  0.1uF  [0402-TIGHT]  96.01,175.96 0 top
C249  0.1uF  [0402-TIGHT]  96.01,172.52 0 top
C250  0.1uF  [0402-TIGHT]  96.01,178.52 0 top
C251  0.1uF  [0402-TIGHT]  91.69,182.25 90 top
C252  0.1uF  [0402-TIGHT]  88.01,182.37 90 top
C253  0.1uF  [0402-TIGHT]  96.01,180.21 0 top
C254  0.1uF  [0402-TIGHT]  96.01,177.61 0 top
C255  2.2uF  [0402-TIGHT]  82.42,171.83 180 top
C256  2.2uF  [0402-TIGHT]  88.72,170.81 270 top
C257  2.2uF  [0402-TIGHT]  96.01,173.43 0 top
C258  0.1uF  [0402-TIGHT]  84.33,157.99 0 top
C259  0.1uF  [0402-TIGHT]  88.94,182.37 270 top
C260  0.1uF  [0402-TIGHT]  88.39,184.78 0 top
C261  1.0uF  [0402-TIGHT]  89.28,154.43 90 top
C262  2.2uF  [0402-TIGHT]  92.2,154.94 180 top
C263  4.7uF  [0402-TIGHT]  87.76,160.4 180 top
C264  4.7uF  [0402-TIGHT]  91.82,158.5 270 top
D1  Yellow  [LED-0603]  18.29,39.88 0 top
D2  1A/23V/620mV  [SOD-323]  22.1,25.91 270 top
D3  RED  [LED-0603]  25.91,15.75 0 top
D4  BLUE  [LED-0603]  18.41,42.42 180 top
D5  1A/23V/620mV  [SOD-323]  45.47,25.91 270 top
D6  Yellow  [LED-0603]  41.66,39.88 0 top
D7  BLUE  [LED-0603]  41.78,42.42 180 top
D8  RED  [LED-0603]  49.28,15.75 0 top
D9  1A/23V/620mV  [SOD-323]  68.83,25.91 270 top
D10  Yellow  [LED-0603]  65.02,39.88 0 top
D11  BLUE  [LED-0603]  65.15,42.42 180 top
D12  RED  [LED-0603]  72.64,15.75 0 top
D13  1A/23V/620mV  [SOD-323]  92.2,25.91 270 top
D14  Yellow  [LED-0603]  88.39,39.88 0 top
D15  BLUE  [LED-0603]  88.52,42.42 180 top
D16  RED  [LED-0603]  96.01,15.75 0 top
D17  1A/23V/620mV  [SOD-323]  22.1,87.38 270 top
D18  Yellow  [LED-0603]  18.29,101.35 0 top
D19  BLUE  [LED-0603]  18.41,103.89 180 top
D20  RED  [LED-0603]  25.91,77.22 0 top
D21  1A/23V/620mV  [SOD-323]  45.47,87.38 270 top
D22  Yellow  [LED-0603]  41.66,101.35 0 top
D23  BLUE  [LED-0603]  41.78,103.89 180 top
D24  RED  [LED-0603]  49.28,77.22 0 top
D25  1A/23V/620mV  [SOD-323]  68.83,87.38 270 top
D26  Yellow  [LED-0603]  65.02,101.35 0 top
D27  BLUE  [LED-0603]  65.15,103.89 180 top
D28  RED  [LED-0603]  72.64,77.22 0 top
D29  1A/23V/620mV  [SOD-323]  92.2,87.38 270 top
D30  Yellow  [LED-0603]  88.39,101.35 0 top
D31  BLUE  [LED-0603]  88.52,103.89 180 top
D32  RED  [LED-0603]  96.01,77.22 0 top
D33  1A/23V/620mV  [SOD-323]  22.1,148.84 270 top
D34  Yellow  [LED-0603]  18.29,162.81 0 top
D35  BLUE  [LED-0603]  18.41,165.35 180 top
D36  RED  [LED-0603]  25.91,138.68 0 top
D37  1A/23V/620mV  [SOD-323]  45.47,148.84 270 top
D38  Yellow  [LED-0603]  41.66,162.81 0 top
D39  BLUE  [LED-0603]  41.78,165.35 180 top
D40  RED  [LED-0603]  49.28,138.68 0 top
D41  1A/23V/620mV  [SOD-323]  68.83,148.84 270 top
D42  Yellow  [LED-0603]  65.02,162.81 0 top
D43  BLUE  [LED-0603]  65.15,165.35 180 top
D44  RED  [LED-0603]  72.64,138.68 0 top
D45  1A/23V/620mV  [SOD-323]  92.2,148.84 270 top
D46  Yellow  [LED-0603]  88.39,162.81 0 top
D47  BLUE  [LED-0603]  88.52,165.35 180 top
D48  RED  [LED-0603]  96.01,138.68 0 top
E$1  [FIDUCIAL-1X2]  13.72,195.39 0 top
E$2  [FIDUCIAL-1X2]  13.72,195.39 0 bottom
E$3  [FIDUCIAL-1X2]  92.9,195.39 0 top
E$4  [FIDUCIAL-1X2]  92.9,195.39 0 bottom
E$5  [FIDUCIAL-1.5X3]  13.72,4.76 0 top
E$6  [FIDUCIAL-1.5X3]  13.72,4.76 0 bottom
FD1  FIDUCIALUFIDUCIAL  [FIDUCIAL-MICRO]  8.13,14.48 0 top
FD2  FIDUCIALUFIDUCIAL  [FIDUCIAL-MICRO]  24.64,66.55 0 top
FD3  FIDUCIALUFIDUCIAL  [FIDUCIAL-MICRO]  11.81,10.29 0 bottom
FD4  FIDUCIALUFIDUCIAL  [FIDUCIAL-MICRO]  24.64,66.55 0 bottom
FD5  FIDUCIALUFIDUCIAL  [FIDUCIAL-MICRO]  31.5,14.48 0 top
FD6  FIDUCIALUFIDUCIAL  [FIDUCIAL-MICRO]  48.01,66.55 0 top
FD7  FIDUCIALUFIDUCIAL  [FIDUCIAL-MICRO]  35.18,10.29 0 bottom
FD8  FIDUCIALUFIDUCIAL  [FIDUCIAL-MICRO]  48.01,66.55 0 bottom
FD9  FIDUCIALUFIDUCIAL  [FIDUCIAL-MICRO]  54.86,14.48 0 top
FD10  FIDUCIALUFIDUCIAL  [FIDUCIAL-MICRO]  71.37,66.55 0 top
FD11  FIDUCIALUFIDUCIAL  [FIDUCIAL-MICRO]  58.55,10.29 0 bottom
FD12  FIDUCIALUFIDUCIAL  [FIDUCIAL-MICRO]  71.37,66.55 0 bottom
FD13  FIDUCIALUFIDUCIAL  [FIDUCIAL-MICRO]  78.23,14.48 0 top
FD14  FIDUCIALUFIDUCIAL  [FIDUCIAL-MICRO]  94.74,66.55 0 top
FD15  FIDUCIALUFIDUCIAL  [FIDUCIAL-MICRO]  81.92,10.29 0 bottom
FD16  FIDUCIALUFIDUCIAL  [FIDUCIAL-MICRO]  94.74,66.55 0 bottom
FD17  FIDUCIALUFIDUCIAL  [FIDUCIAL-MICRO]  8.13,75.95 0 top
FD18  FIDUCIALUFIDUCIAL  [FIDUCIAL-MICRO]  24.64,128.02 0 top
FD19  FIDUCIALUFIDUCIAL  [FIDUCIAL-MICRO]  11.81,71.75 0 bottom
FD20  FIDUCIALUFIDUCIAL  [FIDUCIAL-MICRO]  24.64,128.02 0 bottom
FD21  FIDUCIALUFIDUCIAL  [FIDUCIAL-MICRO]  31.5,75.95 0 top
FD22  FIDUCIALUFIDUCIAL  [FIDUCIAL-MICRO]  48.01,128.02 0 top
FD23  FIDUCIALUFIDUCIAL  [FIDUCIAL-MICRO]  35.18,71.75 0 bottom
FD24  FIDUCIALUFIDUCIAL  [FIDUCIAL-MICRO]  48.01,128.02 0 bottom
FD25  FIDUCIALUFIDUCIAL  [FIDUCIAL-MICRO]  54.86,75.95 0 top
FD26  FIDUCIALUFIDUCIAL  [FIDUCIAL-MICRO]  71.37,128.02 0 top
FD27  FIDUCIALUFIDUCIAL  [FIDUCIAL-MICRO]  58.55,71.75 0 bottom
FD28  FIDUCIALUFIDUCIAL  [FIDUCIAL-MICRO]  71.37,128.02 0 bottom
FD29  FIDUCIALUFIDUCIAL  [FIDUCIAL-MICRO]  78.23,75.95 0 top
FD30  FIDUCIALUFIDUCIAL  [FIDUCIAL-MICRO]  94.74,128.02 0 top
FD31  FIDUCIALUFIDUCIAL  [FIDUCIAL-MICRO]  81.92,71.75 0 bottom
FD32  FIDUCIALUFIDUCIAL  [FIDUCIAL-MICRO]  94.74,128.02 0 bottom
FD33  FIDUCIALUFIDUCIAL  [FIDUCIAL-MICRO]  8.13,137.41 0 top
FD34  FIDUCIALUFIDUCIAL  [FIDUCIAL-MICRO]  24.64,189.48 0 top
FD35  FIDUCIALUFIDUCIAL  [FIDUCIAL-MICRO]  11.81,133.22 0 bottom
FD36  FIDUCIALUFIDUCIAL  [FIDUCIAL-MICRO]  24.64,189.48 0 bottom
FD37  FIDUCIALUFIDUCIAL  [FIDUCIAL-MICRO]  31.5,137.41 0 top
FD38  FIDUCIALUFIDUCIAL  [FIDUCIAL-MICRO]  48.01,189.48 0 top
FD39  FIDUCIALUFIDUCIAL  [FIDUCIAL-MICRO]  35.18,133.22 0 bottom
FD40  FIDUCIALUFIDUCIAL  [FIDUCIAL-MICRO]  48.01,189.48 0 bottom
FD41  FIDUCIALUFIDUCIAL  [FIDUCIAL-MICRO]  54.86,137.41 0 top
FD42  FIDUCIALUFIDUCIAL  [FIDUCIAL-MICRO]  71.37,189.48 0 top
FD43  FIDUCIALUFIDUCIAL  [FIDUCIAL-MICRO]  58.55,133.22 0 bottom
FD44  FIDUCIALUFIDUCIAL  [FIDUCIAL-MICRO]  71.37,189.48 0 bottom
FD45  FIDUCIALUFIDUCIAL  [FIDUCIAL-MICRO]  78.23,137.41 0 top
FD46  FIDUCIALUFIDUCIAL  [FIDUCIAL-MICRO]  94.74,189.48 0 top
FD47  FIDUCIALUFIDUCIAL  [FIDUCIAL-MICRO]  81.92,133.22 0 bottom
FD48  FIDUCIALUFIDUCIAL  [FIDUCIAL-MICRO]  94.74,189.48 0 bottom
H1  STAND-OFF  [STAND-OFF]  9.4,65.28 0 top
H2  STAND-OFF  [STAND-OFF]  27.18,65.28 0 top
H3  STAND-OFF  [STAND-OFF]  27.18,11.94 0 top
H4  STAND-OFF  [STAND-OFF]  9.4,11.94 0 top
H5  STAND-OFF  [STAND-OFF]  32.77,65.28 0 top
H6  STAND-OFF  [STAND-OFF]  50.55,65.28 0 top
H7  STAND-OFF  [STAND-OFF]  50.55,11.94 0 top
H8  STAND-OFF  [STAND-OFF]  32.77,11.94 0 top
H9  STAND-OFF  [STAND-OFF]  56.13,65.28 0 top
H10  STAND-OFF  [STAND-OFF]  73.91,65.28 0 top
H11  STAND-OFF  [STAND-OFF]  73.91,11.94 0 top
H12  STAND-OFF  [STAND-OFF]  56.13,11.94 0 top
H13  STAND-OFF  [STAND-OFF]  79.5,65.28 0 top
H14  STAND-OFF  [STAND-OFF]  97.28,65.28 0 top
H15  STAND-OFF  [STAND-OFF]  97.28,11.94 0 top
H16  STAND-OFF  [STAND-OFF]  79.5,11.94 0 top
H17  STAND-OFF  [STAND-OFF]  9.4,126.75 0 top
H18  STAND-OFF  [STAND-OFF]  27.18,126.75 0 top
H19  STAND-OFF  [STAND-OFF]  27.18,73.41 0 top
H20  STAND-OFF  [STAND-OFF]  9.4,73.41 0 top
H21  STAND-OFF  [STAND-OFF]  32.77,126.75 0 top
H22  STAND-OFF  [STAND-OFF]  50.55,126.75 0 top
H23  STAND-OFF  [STAND-OFF]  50.55,73.41 0 top
H24  STAND-OFF  [STAND-OFF]  32.77,73.41 0 top
H25  STAND-OFF  [STAND-OFF]  56.13,126.75 0 top
H26  STAND-OFF  [STAND-OFF]  73.91,126.75 0 top
H27  STAND-OFF  [STAND-OFF]  73.91,73.41 0 top
H28  STAND-OFF  [STAND-OFF]  56.13,73.41 0 top
H29  STAND-OFF  [STAND-OFF]  79.5,126.75 0 top
H30  STAND-OFF  [STAND-OFF]  97.28,126.75 0 top
H31  STAND-OFF  [STAND-OFF]  97.28,73.41 0 top
H32  STAND-OFF  [STAND-OFF]  79.5,73.41 0 top
H33  STAND-OFF  [STAND-OFF]  9.4,188.21 0 top
H34  STAND-OFF  [STAND-OFF]  27.18,188.21 0 top
H35  STAND-OFF  [STAND-OFF]  27.18,134.87 0 top
H36  STAND-OFF  [STAND-OFF]  9.4,134.87 0 top
H37  STAND-OFF  [STAND-OFF]  32.77,188.21 0 top
H38  STAND-OFF  [STAND-OFF]  50.55,188.21 0 top
H39  STAND-OFF  [STAND-OFF]  50.55,134.87 0 top
H40  STAND-OFF  [STAND-OFF]  32.77,134.87 0 top
H41  STAND-OFF  [STAND-OFF]  56.13,188.21 0 top
H42  STAND-OFF  [STAND-OFF]  73.91,188.21 0 top
H43  STAND-OFF  [STAND-OFF]  73.91,134.87 0 top
H44  STAND-OFF  [STAND-OFF]  56.13,134.87 0 top
H45  STAND-OFF  [STAND-OFF]  79.5,188.21 0 top
H46  STAND-OFF  [STAND-OFF]  97.28,188.21 0 top
H47  STAND-OFF  [STAND-OFF]  97.28,134.87 0 top
H48  STAND-OFF  [STAND-OFF]  79.5,134.87 0 top
J1  SWD  [2X5-PTH-1.27MM]  13.21,43.69 270 top
J2  Qwiic  [JST04_1MM_RA]  35.31,18.8 270 top
J3  Qwiic  [JST04_1MM_RA]  11.94,18.8 270 top
J4  [JST-2-SMD]  10.41,27.43 90 top
J5  USB C  [USB-C-16P-4LAYER-ISOLATED]  18.29,15.75 0 top
J6  microSD  [MICRO-SD-SOCKET]  12.83,47.75 0 bottom
J7  [1X16_NO_SILK]  28.45,23.37 90 top
J8  [1X12_NO_SILK]  8.13,33.53 90 top
J9  [JST-2-SMD]  33.78,27.43 90 top
J10  USB C  [USB-C-16P-4LAYER-ISOLATED]  41.66,15.75 0 top
J11  microSD  [MICRO-SD-SOCKET]  36.2,47.75 0 bottom
J12  [1X16_NO_SILK]  51.82,23.37 90 top
J13  [1X12_NO_SILK]  31.5,33.53 90 top
J14  SWD  [2X5-PTH-1.27MM]  36.58,43.69 270 top
J15  Qwiic  [JST04_1MM_RA]  58.67,18.8 270 top
J16  [JST-2-SMD]  57.15,27.43 90 top
J17  USB C  [USB-C-16P-4LAYER-ISOLATED]  65.02,15.75 0 top
J18  microSD  [MICRO-SD-SOCKET]  59.56,47.75 0 bottom
J19  [1X16_NO_SILK]  75.18,23.37 90 top
J20  [1X12_NO_SILK]  54.86,33.53 90 top
J21  SWD  [2X5-PTH-1.27MM]  59.94,43.69 270 top
J22  Qwiic  [JST04_1MM_RA]  82.04,18.8 270 top
J23  [JST-2-SMD]  80.52,27.43 90 top
J24  USB C  [USB-C-16P-4LAYER-ISOLATED]  88.39,15.75 0 top
J25  microSD  [MICRO-SD-SOCKET]  82.93,47.75 0 bottom
J26  [1X16_NO_SILK]  98.55,23.37 90 top
J27  [1X12_NO_SILK]  78.23,33.53 90 top
J28  SWD  [2X5-PTH-1.27MM]  83.31,43.69 270 top
J29  Qwiic  [JST04_1MM_RA]  11.94,80.26 270 top
J30  [JST-2-SMD]  10.41,88.9 90 top
J31  USB C  [USB-C-16P-4LAYER-ISOLATED]  18.29,77.22 0 top
J32  microSD  [MICRO-SD-SOCKET]  12.83,109.22 0 bottom
J33  [1X16_NO_SILK]  28.45,84.84 90 top
J34  [1X12_NO_SILK]  8.13,95 90 top
J35  SWD  [2X5-PTH-1.27MM]  13.21,105.16 270 top
J36  Qwiic  [JST04_1MM_RA]  35.31,80.26 270 top
J37  [JST-2-SMD]  33.78,88.9 90 top
J38  USB C  [USB-C-16P-4LAYER-ISOLATED]  41.66,77.22 0 top
J39  microSD  [MICRO-SD-SOCKET]  36.2,109.22 0 bottom
J40  [1X16_NO_SILK]  51.82,84.84 90 top
J41  [1X12_NO_SILK]  31.5,95 90 top
J42  SWD  [2X5-PTH-1.27MM]  36.58,105.16 270 top
J43  Qwiic  [JST04_1MM_RA]  58.67,80.26 270 top
J44  [JST-2-SMD]  57.15,88.9 90 top
J45  USB C  [USB-C-16P-4LAYER-ISOLATED]  65.02,77.22 0 top
J46  microSD  [MICRO-SD-SOCKET]  59.56,109.22 0 bottom
J47  [1X16_NO_SILK]  75.18,84.84 90 top
J48  [1X12_NO_SILK]  54.86,95 90 top
J49  SWD  [2X5-PTH-1.27MM]  59.94,105.16 270 top
J50  Qwiic  [JST04_1MM_RA]  82.04,80.26 270 top
J51  [JST-2-SMD]  80.52,88.9 90 top
J52  USB C  [USB-C-16P-4LAYER-ISOLATED]  88.39,77.22 0 top
J53  microSD  [MICRO-SD-SOCKET]  82.93,109.22 0 bottom
J54  [1X16_NO_SILK]  98.55,84.84 90 top
J55  [1X12_NO_SILK]  78.23,95 90 top
J56  SWD  [2X5-PTH-1.27MM]  83.31,105.16 270 top
J57  Qwiic  [JST04_1MM_RA]  11.94,141.73 270 top
J58  [JST-2-SMD]  10.41,150.37 90 top
J59  USB C  [USB-C-16P-4LAYER-ISOLATED]  18.29,138.68 0 top
J60  microSD  [MICRO-SD-SOCKET]  12.83,170.69 0 bottom
J61  [1X16_NO_SILK]  28.45,146.3 90 top
J62  [1X12_NO_SILK]  8.13,156.46 90 top
J63  SWD  [2X5-PTH-1.27MM]  13.21,166.62 270 top
J64  Qwiic  [JST04_1MM_RA]  35.31,141.73 270 top
J65  [JST-2-SMD]  33.78,150.37 90 top
J66  USB C  [USB-C-16P-4LAYER-ISOLATED]  41.66,138.68 0 top
J67  microSD  [MICRO-SD-SOCKET]  36.2,170.69 0 bottom
J68  [1X16_NO_SILK]  51.82,146.3 90 top
J69  [1X12_NO_SILK]  31.5,156.46 90 top
J70  SWD  [2X5-PTH-1.27MM]  36.58,166.62 270 top
J71  Qwiic  [JST04_1MM_RA]  58.67,141.73 270 top
J72  [JST-2-SMD]  57.15,150.37 90 top
J73  USB C  [USB-C-16P-4LAYER-ISOLATED]  65.02,138.68 0 top
J74  microSD  [MICRO-SD-SOCKET]  59.56,170.69 0 bottom
J75  [1X16_NO_SILK]  75.18,146.3 90 top
J76  [1X12_NO_SILK]  54.86,156.46 90 top
J77  SWD  [2X5-PTH-1.27MM]  59.94,166.62 270 top
J78  Qwiic  [JST04_1MM_RA]  82.04,141.73 270 top
J79  [JST-2-SMD]  80.52,150.37 90 top
J80  USB C  [USB-C-16P-4LAYER-ISOLATED]  88.39,138.68 0 top
J81  microSD  [MICRO-SD-SOCKET]  82.93,170.69 0 bottom
J82  [1X16_NO_SILK]  98.55,146.3 90 top
J83  [1X12_NO_SILK]  78.23,156.46 90 top
J84  SWD  [2X5-PTH-1.27MM]  83.31,166.62 270 top
JP1  JUMPER-SMT_3_2-NC_TRACE_SILK  [SMT-JUMPER_3_2-NC_TRACE_SILK]  15.11,18.92 270 bottom
JP2  JUMPER-SMT_3_2-NC_TRACE_SILK  [SMT-JUMPER_3_2-NC_TRACE_SILK]  38.48,18.92 270 bottom
JP3  JUMPER-SMT_3_2-NC_TRACE_SILK  [SMT-JUMPER_3_2-NC_TRACE_SILK]  61.85,18.92 270 bottom
JP4  JUMPER-SMT_3_2-NC_TRACE_SILK  [SMT-JUMPER_3_2-NC_TRACE_SILK]  85.22,18.92 270 bottom
JP5  JUMPER-SMT_3_2-NC_TRACE_SILK  [SMT-JUMPER_3_2-NC_TRACE_SILK]  15.11,80.39 270 bottom
JP6  JUMPER-SMT_3_2-NC_TRACE_SILK  [SMT-JUMPER_3_2-NC_TRACE_SILK]  38.48,80.39 270 bottom
JP7  JUMPER-SMT_3_2-NC_TRACE_SILK  [SMT-JUMPER_3_2-NC_TRACE_SILK]  61.85,80.39 270 bottom
JP8  JUMPER-SMT_3_2-NC_TRACE_SILK  [SMT-JUMPER_3_2-NC_TRACE_SILK]  85.22,80.39 270 bottom
JP9  JUMPER-SMT_3_2-NC_TRACE_SILK  [SMT-JUMPER_3_2-NC_TRACE_SILK]  15.11,141.86 270 bottom
JP10  JUMPER-SMT_3_2-NC_TRACE_SILK  [SMT-JUMPER_3_2-NC_TRACE_SILK]  38.48,141.86 270 bottom
JP11  JUMPER-SMT_3_2-NC_TRACE_SILK  [SMT-JUMPER_3_2-NC_TRACE_SILK]  61.85,141.86 270 bottom
JP12  JUMPER-SMT_3_2-NC_TRACE_SILK  [SMT-JUMPER_3_2-NC_TRACE_SILK]  85.22,141.86 270 bottom
Q1  20V/4.2A/52mΩ/1.4W  [SOT23-3]  19.18,25.91 90 top
Q2  20V/4.2A/52mΩ/1.4W  [SOT23-3]  42.54,25.91 90 top
Q3  20V/4.2A/52mΩ/1.4W  [SOT23-3]  65.91,25.91 90 top
Q4  20V/4.2A/52mΩ/1.4W  [SOT23-3]  89.28,25.91 90 top
Q5  20V/4.2A/52mΩ/1.4W  [SOT23-3]  19.18,87.38 90 top
Q6  20V/4.2A/52mΩ/1.4W  [SOT23-3]  42.54,87.38 90 top
Q7  20V/4.2A/52mΩ/1.4W  [SOT23-3]  65.91,87.38 90 top
Q8  20V/4.2A/52mΩ/1.4W  [SOT23-3]  89.28,87.38 90 top
Q9  20V/4.2A/52mΩ/1.4W  [SOT23-3]  19.18,148.84 90 top
Q10  20V/4.2A/52mΩ/1.4W  [SOT23-3]  42.54,148.84 90 top
Q11  20V/4.2A/52mΩ/1.4W  [SOT23-3]  65.91,148.84 90 top
Q12  20V/4.2A/52mΩ/1.4W  [SOT23-3]  89.28,148.84 90 top
R1  5.1k  [0402-TIGHT]  12.83,12.83 90 top
R2  1k  [0402-TIGHT]  17.65,38.38 0 top
R3  1k  [0402-TIGHT]  15.88,42.93 270 top
R4  5.1k  [0402-TIGHT]  23.75,12.83 90 top
R5  1k  [0402-TIGHT]  20.55,38.01 180 bottom
R6  2.0k  [0603]  16,34.42 270 top
R7  200OHM-0402T-1/16W-1%  [0402-TIGHT]  25.91,52.11 180 top
R8  1k  [0402-TIGHT]  28.45,15.75 270 top
R9  10k  [0402-TIGHT]  20.55,38.94 180 bottom
R10  2.2k  [0402-TIGHT]  17.02,17.02 90 bottom
R11  1k  [0402-TIGHT]  12.32,50.76 0 top
R12  27  [0402-TIGHT]  22.53,46.36 90 bottom
R13  27  [0402-TIGHT]  23.47,46.36 90 bottom
R14  1k  [0402-TIGHT]  35.69,50.76 0 top
R15  10k  [0402-TIGHT]  21.08,23.62 180 top
R16  10k  [0402-TIGHT]  19.18,29.46 90 top
R17  2.2k  [0402-TIGHT]  17.02,20.83 270 bottom
R18  27  [0402-TIGHT]  45.9,46.36 90 bottom
R19  27  [0402-TIGHT]  46.84,46.36 90 bottom
R20  2.2k  [0402-TIGHT]  40.39,17.02 90 bottom
R21  2.2k  [0402-TIGHT]  40.39,20.83 270 bottom
R22  1k  [0402-TIGHT]  43.92,38.01 180 bottom
R23  10k  [0402-TIGHT]  43.92,38.94 180 bottom
R24  5.1k  [0402-TIGHT]  36.2,12.83 90 top
R25  5.1k  [0402-TIGHT]  47.12,12.83 90 top
R26  10k  [0402-TIGHT]  44.45,23.62 180 top
R27  10k  [0402-TIGHT]  42.54,29.46 90 top
R28  1k  [0402-TIGHT]  41.02,38.38 0 top
R29  1k  [0402-TIGHT]  39.24,42.93 270 top
R30  200OHM-0402T-1/16W-1%  [0402-TIGHT]  49.28,52.11 180 top
R31  2.0k  [0603]  39.37,34.42 270 top
R32  1k  [0402-TIGHT]  51.82,15.75 270 top
R33  1k  [0402-TIGHT]  59.05,50.76 0 top
R34  27  [0402-TIGHT]  69.27,46.36 90 bottom
R35  27  [0402-TIGHT]  70.21,46.36 90 bottom
R36  2.2k  [0402-TIGHT]  63.75,17.02 90 bottom
R37  2.2k  [0402-TIGHT]  63.75,20.83 270 bottom
R38  1k  [0402-TIGHT]  67.28,38.01 180 bottom
R39  10k  [0402-TIGHT]  67.28,38.94 180 bottom
R40  5.1k  [0402-TIGHT]  59.56,12.83 90 top
R41  5.1k  [0402-TIGHT]  70.48,12.83 90 top
R42  10k  [0402-TIGHT]  67.82,23.62 180 top
R43  10k  [0402-TIGHT]  65.91,29.46 90 top
R44  1k  [0402-TIGHT]  64.39,38.38 0 top
R45  1k  [0402-TIGHT]  62.61,42.93 270 top
R46  200OHM-0402T-1/16W-1%  [0402-TIGHT]  72.64,52.11 180 top
R47  2.0k  [0603]  62.74,34.42 270 top
R48  1k  [0402-TIGHT]  75.18,15.75 270 top
R49  1k  [0402-TIGHT]  82.42,50.76 0 top
R50  27  [0402-TIGHT]  92.63,46.36 90 bottom
R51  27  [0402-TIGHT]  93.57,46.36 90 bottom
R52  2.2k  [0402-TIGHT]  87.12,17.02 90 bottom
R53  2.2k  [0402-TIGHT]  87.12,20.83 270 bottom
R54  1k  [0402-TIGHT]  90.65,38.01 180 bottom
R55  10k  [0402-TIGHT]  90.65,38.94 180 bottom
R56  5.1k  [0402-TIGHT]  82.93,12.83 90 top
R57  5.1k  [0402-TIGHT]  93.85,12.83 90 top
R58  10k  [0402-TIGHT]  91.19,23.62 180 top
R59  10k  [0402-TIGHT]  89.28,29.46 90 top
R60  1k  [0402-TIGHT]  87.76,38.38 0 top
R61  1k  [0402-TIGHT]  85.98,42.93 270 top
R62  200OHM-0402T-1/16W-1%  [0402-TIGHT]  96.01,52.11 180 top
R63  2.0k  [0603]  86.11,34.42 270 top
R64  1k  [0402-TIGHT]  98.55,15.75 270 top
R65  1k  [0402-TIGHT]  12.32,112.23 0 top
R66  27  [0402-TIGHT]  22.53,107.82 90 bottom
R67  27  [0402-TIGHT]  23.47,107.82 90 bottom
R68  2.2k  [0402-TIGHT]  17.02,78.49 90 bottom
R69  2.2k  [0402-TIGHT]  17.02,82.3 270 bottom
R70  1k  [0402-TIGHT]  20.55,99.48 180 bottom
R71  10k  [0402-TIGHT]  20.55,100.41 180 bottom
R72  5.1k  [0402-TIGHT]  12.83,74.3 90 top
R73  5.1k  [0402-TIGHT]  23.75,74.3 90 top
R74  10k  [0402-TIGHT]  21.08,85.09 180 top
R75  10k  [0402-TIGHT]  19.18,90.93 90 top
R76  1k  [0402-TIGHT]  17.65,99.85 0 top
R77  1k  [0402-TIGHT]  15.88,104.39 270 top
R78  200OHM-0402T-1/16W-1%  [0402-TIGHT]  25.91,113.58 180 top
R79  2.0k  [0603]  16,95.88 270 top
R80  1k  [0402-TIGHT]  28.45,77.22 270 top
R81  1k  [0402-TIGHT]  35.69,112.23 0 top
R82  27  [0402-TIGHT]  45.9,107.82 90 bottom
R83  27  [0402-TIGHT]  46.84,107.82 90 bottom
R84  2.2k  [0402-TIGHT]  40.39,78.49 90 bottom
R85  2.2k  [0402-TIGHT]  40.39,82.3 270 bottom
R86  1k  [0402-TIGHT]  43.92,99.48 180 bottom
R87  10k  [0402-TIGHT]  43.92,100.41 180 bottom
R88  5.1k  [0402-TIGHT]  36.2,74.3 90 top
R89  5.1k  [0402-TIGHT]  47.12,74.3 90 top
R90  10k  [0402-TIGHT]  44.45,85.09 180 top
R91  10k  [0402-TIGHT]  42.54,90.93 90 top
R92  1k  [0402-TIGHT]  41.02,99.85 0 top
R93  1k  [0402-TIGHT]  39.24,104.39 270 top
R94  200OHM-0402T-1/16W-1%  [0402-TIGHT]  49.28,113.58 180 top
R95  2.0k  [0603]  39.37,95.88 270 top
R96  1k  [0402-TIGHT]  51.82,77.22 270 top
R97  1k  [0402-TIGHT]  59.05,112.23 0 top
R98  27  [0402-TIGHT]  69.27,107.82 90 bottom
R99  27  [0402-TIGHT]  70.21,107.82 90 bottom
R100  2.2k  [0402-TIGHT]  63.75,78.49 90 bottom
R101  2.2k  [0402-TIGHT]  63.75,82.3 270 bottom
R102  1k  [0402-TIGHT]  67.28,99.48 180 bottom
R103  10k  [0402-TIGHT]  67.28,100.41 180 bottom
R104  5.1k  [0402-TIGHT]  59.56,74.3 90 top
R105  5.1k  [0402-TIGHT]  70.48,74.3 90 top
R106  10k  [0402-TIGHT]  67.82,85.09 180 top
R107  10k  [0402-TIGHT]  65.91,90.93 90 top
R108  1k  [0402-TIGHT]  64.39,99.85 0 top
R109  1k  [0402-TIGHT]  62.61,104.39 270 top
R110  200OHM-0402T-1/16W-1%  [0402-TIGHT]  72.64,113.58 180 top
R111  2.0k  [0603]  62.74,95.88 270 top
R112  1k  [0402-TIGHT]  75.18,77.22 270 top
R113  1k  [0402-TIGHT]  82.42,112.23 0 top
R114  27  [0402-TIGHT]  92.63,107.82 90 bottom
R115  27  [0402-TIGHT]  93.57,107.82 90 bottom
R116  2.2k  [0402-TIGHT]  87.12,78.49 90 bottom
R117  2.2k  [0402-TIGHT]  87.12,82.3 270 bottom
R118  1k  [0402-TIGHT]  90.65,99.48 180 bottom
R119  10k  [0402-TIGHT]  90.65,100.41 180 bottom
R120  5.1k  [0402-TIGHT]  82.93,74.3 90 top
R121  5.1k  [0402-TIGHT]  93.85,74.3 90 top
R122  10k  [0402-TIGHT]  91.19,85.09 180 top
R123  10k  [0402-TIGHT]  89.28,90.93 90 top
R124  1k  [0402-TIGHT]  87.76,99.85 0 top
R125  1k  [0402-TIGHT]  85.98,104.39 270 top
R126  200OHM-0402T-1/16W-1%  [0402-TIGHT]  96.01,113.58 180 top
R127  2.0k  [0603]  86.11,95.88 270 top
R128  1k  [0402-TIGHT]  98.55,77.22 270 top
R129  1k  [0402-TIGHT]  12.32,173.7 0 top
R130  27  [0402-TIGHT]  22.53,169.29 90 bottom
R131  27  [0402-TIGHT]  23.47,169.29 90 bottom
R132  2.2k  [0402-TIGHT]  17.02,139.95 90 bottom
R133  2.2k  [0402-TIGHT]  17.02,143.76 270 bottom
R134  1k  [0402-TIGHT]  20.55,160.95 180 bottom
R135  10k  [0402-TIGHT]  20.55,161.87 180 bottom
R136  5.1k  [0402-TIGHT]  12.83,135.76 90 top
R137  5.1k  [0402-TIGHT]  23.75,135.76 90 top
R138  10k  [0402-TIGHT]  21.08,146.56 180 top
R139  10k  [0402-TIGHT]  19.18,152.4 90 top
R140  1k  [0402-TIGHT]  17.65,161.32 0 top
R141  1k  [0402-TIGHT]  15.88,165.86 270 top
R142  200OHM-0402T-1/16W-1%  [0402-TIGHT]  25.91,175.04 180 top
R143  2.0k  [0603]  16,157.35 270 top
R144  1k  [0402-TIGHT]  28.45,138.68 270 top
R145  1k  [0402-TIGHT]  35.69,173.7 0 top
R146  27  [0402-TIGHT]  45.9,169.29 90 bottom
R147  27  [0402-TIGHT]  46.84,169.29 90 bottom
R148  2.2k  [0402-TIGHT]  40.39,139.95 90 bottom
R149  2.2k  [0402-TIGHT]  40.39,143.76 270 bottom
R150  1k  [0402-TIGHT]  43.92,160.95 180 bottom
R151  10k  [0402-TIGHT]  43.92,161.87 180 bottom
R152  5.1k  [0402-TIGHT]  36.2,135.76 90 top
R153  5.1k  [0402-TIGHT]  47.12,135.76 90 top
R154  10k  [0402-TIGHT]  44.45,146.56 180 top
R155  10k  [0402-TIGHT]  42.54,152.4 90 top
R156  1k  [0402-TIGHT]  41.02,161.32 0 top
R157  1k  [0402-TIGHT]  39.24,165.86 270 top
R158  200OHM-0402T-1/16W-1%  [0402-TIGHT]  49.28,175.04 180 top
R159  2.0k  [0603]  39.37,157.35 270 top
R160  1k  [0402-TIGHT]  51.82,138.68 270 top
R161  1k  [0402-TIGHT]  59.05,173.7 0 top
R162  27  [0402-TIGHT]  69.27,169.29 90 bottom
R163  27  [0402-TIGHT]  70.21,169.29 90 bottom
R164  2.2k  [0402-TIGHT]  63.75,139.95 90 bottom
R165  2.2k  [0402-TIGHT]  63.75,143.76 270 bottom
R166  1k  [0402-TIGHT]  67.28,160.95 180 bottom
R167  10k  [0402-TIGHT]  67.28,161.87 180 bottom
R168  5.1k  [0402-TIGHT]  59.56,135.76 90 top
R169  5.1k  [0402-TIGHT]  70.48,135.76 90 top
R170  10k  [0402-TIGHT]  67.82,146.56 180 top
R171  10k  [0402-TIGHT]  65.91,152.4 90 top
R172  1k  [0402-TIGHT]  64.39,161.32 0 top
R173  1k  [0402-TIGHT]  62.61,165.86 270 top
R174  200OHM-0402T-1/16W-1%  [0402-TIGHT]  72.64,175.04 180 top
R175  2.0k  [0603]  62.74,157.35 270 top
R176  1k  [0402-TIGHT]  75.18,138.68 270 top
R177  1k  [0402-TIGHT]  82.42,173.7 0 top
R178  27  [0402-TIGHT]  92.63,169.29 90 bottom
R179  27  [0402-TIGHT]  93.57,169.29 90 bottom
R180  2.2k  [0402-TIGHT]  87.12,139.95 90 bottom
R181  2.2k  [0402-TIGHT]  87.12,143.76 270 bottom
R182  1k  [0402-TIGHT]  90.65,160.95 180 bottom
R183  10k  [0402-TIGHT]  90.65,161.87 180 bottom
R184  5.1k  [0402-TIGHT]  82.93,135.76 90 top
R185  5.1k  [0402-TIGHT]  93.85,135.76 90 top
R186  10k  [0402-TIGHT]  91.19,146.56 180 top
R187  10k  [0402-TIGHT]  89.28,152.4 90 top
R188  1k  [0402-TIGHT]  87.76,161.32 0 top
R189  1k  [0402-TIGHT]  85.98,165.86 270 top
R190  200OHM-0402T-1/16W-1%  [0402-TIGHT]  96.01,175.04 180 top
R191  2.0k  [0603]  86.11,157.35 270 top
R192  1k  [0402-TIGHT]  98.55,138.68 270 top
S1  MOMENTARY-SWITCH-SPST-SMD-5.2MM-TALL  [TACTILE_SWITCH_SMD_5.2MM]  18.29,19.56 0 top
S2  MOMENTARY-SWITCH-SPST-SMD-5.2MM-TALL  [TACTILE_SWITCH_SMD_5.2MM]  25.91,19.56 180 top
S3  MOMENTARY-SWITCH-SPST-SMD-5.2MM-TALL  [TACTILE_SWITCH_SMD_5.2MM]  49.28,19.56 180 top
S4  MOMENTARY-SWITCH-SPST-SMD-5.2MM-TALL  [TACTILE_SWITCH_SMD_5.2MM]  41.66,19.56 0 top
S5  MOMENTARY-SWITCH-SPST-SMD-5.2MM-TALL  [TACTILE_SWITCH_SMD_5.2MM]  72.64,19.56 180 top
S6  MOMENTARY-SWITCH-SPST-SMD-5.2MM-TALL  [TACTILE_SWITCH_SMD_5.2MM]  65.02,19.56 0 top
S7  MOMENTARY-SWITCH-SPST-SMD-5.2MM-TALL  [TACTILE_SWITCH_SMD_5.2MM]  96.01,19.56 180 top
S8  MOMENTARY-SWITCH-SPST-SMD-5.2MM-TALL  [TACTILE_SWITCH_SMD_5.2MM]  88.39,19.56 0 top
S9  MOMENTARY-SWITCH-SPST-SMD-5.2MM-TALL  [TACTILE_SWITCH_SMD_5.2MM]  25.91,81.03 180 top
S10  MOMENTARY-SWITCH-SPST-SMD-5.2MM-TALL  [TACTILE_SWITCH_SMD_5.2MM]  18.29,81.03 0 top
S11  MOMENTARY-SWITCH-SPST-SMD-5.2MM-TALL  [TACTILE_SWITCH_SMD_5.2MM]  49.28,81.03 180 top
S12  MOMENTARY-SWITCH-SPST-SMD-5.2MM-TALL  [TACTILE_SWITCH_SMD_5.2MM]  41.66,81.03 0 top
S13  MOMENTARY-SWITCH-SPST-SMD-5.2MM-TALL  [TACTILE_SWITCH_SMD_5.2MM]  72.64,81.03 180 top
S14  MOMENTARY-SWITCH-SPST-SMD-5.2MM-TALL  [TACTILE_SWITCH_SMD_5.2MM]  65.02,81.03 0 top
S15  MOMENTARY-SWITCH-SPST-SMD-5.2MM-TALL  [TACTILE_SWITCH_SMD_5.2MM]  96.01,81.03 180 top
S16  MOMENTARY-SWITCH-SPST-SMD-5.2MM-TALL  [TACTILE_SWITCH_SMD_5.2MM]  88.39,81.03 0 top
S17  MOMENTARY-SWITCH-SPST-SMD-5.2MM-TALL  [TACTILE_SWITCH_SMD_5.2MM]  25.91,142.49 180 top
S18  MOMENTARY-SWITCH-SPST-SMD-5.2MM-TALL  [TACTILE_SWITCH_SMD_5.2MM]  18.29,142.49 0 top
S19  MOMENTARY-SWITCH-SPST-SMD-5.2MM-TALL  [TACTILE_SWITCH_SMD_5.2MM]  49.28,142.49 180 top
S20  MOMENTARY-SWITCH-SPST-SMD-5.2MM-TALL  [TACTILE_SWITCH_SMD_5.2MM]  41.66,142.49 0 top
S21  MOMENTARY-SWITCH-SPST-SMD-5.2MM-TALL  [TACTILE_SWITCH_SMD_5.2MM]  72.64,142.49 180 top
S22  MOMENTARY-SWITCH-SPST-SMD-5.2MM-TALL  [TACTILE_SWITCH_SMD_5.2MM]  65.02,142.49 0 top
S23  MOMENTARY-SWITCH-SPST-SMD-5.2MM-TALL  [TACTILE_SWITCH_SMD_5.2MM]  96.01,142.49 180 top
S24  MOMENTARY-SWITCH-SPST-SMD-5.2MM-TALL  [TACTILE_SWITCH_SMD_5.2MM]  88.39,142.49 0 top
TP1  [PAD.03X.04]  9.4,39.88 0 bottom
TP2  [PAD.03X.04]  11.94,39.88 0 bottom
TP3  [PAD.03X.04]  14.48,39.88 0 bottom
TP4  [PAD.03X.04]  32.77,39.88 0 bottom
TP5  [PAD.03X.04]  35.31,39.88 0 bottom
TP6  [PAD.03X.04]  37.85,39.88 0 bottom
TP7  [PAD.03X.04]  56.13,39.88 0 bottom
TP8  [PAD.03X.04]  58.67,39.88 0 bottom
TP9  [PAD.03X.04]  61.21,39.88 0 bottom
TP10  [PAD.03X.04]  79.5,39.88 0 bottom
TP11  [PAD.03X.04]  82.04,39.88 0 bottom
TP12  [PAD.03X.04]  84.58,39.88 0 bottom
TP13  [PAD.03X.04]  9.4,101.35 0 bottom
TP14  [PAD.03X.04]  11.94,101.35 0 bottom
TP15  [PAD.03X.04]  14.48,101.35 0 bottom
TP16  [PAD.03X.04]  32.77,101.35 0 bottom
TP17  [PAD.03X.04]  35.31,101.35 0 bottom
TP18  [PAD.03X.04]  37.85,101.35 0 bottom
TP19  [PAD.03X.04]  56.13,101.35 0 bottom
TP20  [PAD.03X.04]  58.67,101.35 0 bottom
TP21  [PAD.03X.04]  61.21,101.35 0 bottom
TP22  [PAD.03X.04]  79.5,101.35 0 bottom
TP23  [PAD.03X.04]  82.04,101.35 0 bottom
TP24  [PAD.03X.04]  84.58,101.35 0 bottom
TP25  [PAD.03X.04]  9.4,162.81 0 bottom
TP26  [PAD.03X.04]  11.94,162.81 0 bottom
TP27  [PAD.03X.04]  14.48,162.81 0 bottom
TP28  [PAD.03X.04]  32.77,162.81 0 bottom
TP29  [PAD.03X.04]  35.31,162.81 0 bottom
TP30  [PAD.03X.04]  37.85,162.81 0 bottom
TP31  [PAD.03X.04]  56.13,162.81 0 bottom
TP32  [PAD.03X.04]  58.67,162.81 0 bottom
TP33  [PAD.03X.04]  61.21,162.81 0 bottom
TP34  [PAD.03X.04]  79.5,162.81 0 bottom
TP35  [PAD.03X.04]  82.04,162.81 0 bottom
TP36  [PAD.03X.04]  84.58,162.81 0 bottom
U1  W25QXX128MBIT  [WSON-8-6X5-SKINNY_CENTERPAD]  41.78,42.29 0 bottom
U2  MAX17048  [DFN-8]  14.22,37.34 0 top
U3  MCP73831  [SOT23-5]  18.8,35.05 90 top
U4  W25QXX128MBIT  [WSON-8-6X5-SKINNY_CENTERPAD]  18.41,42.29 0 bottom
U5  RP2040  [QFN-56]  18.92,52.7 270 top
U6  WS2812-2020  [WS2812-2020]  18.29,64.01 0 top
U7  3.3V  [SOT23-5]  22.1,29.72 270 top
U8  RP2040  [QFN-56]  42.29,52.7 270 top
U9  MAX17048  [DFN-8]  37.59,37.34 0 top
U10  WS2812-2020  [WS2812-2020]  41.66,64.01 0 top
U11  3.3V  [SOT23-5]  45.47,29.72 270 top
U12  MCP73831  [SOT23-5]  42.16,35.05 90 top
U13  W25QXX128MBIT  [WSON-8-6X5-SKINNY_CENTERPAD]  65.15,42.29 0 bottom
U14  RP2040  [QFN-56]  65.66,52.7 270 top
U15  MAX17048  [DFN-8]  60.96,37.34 0 top
U16  WS2812-2020  [WS2812-2020]  65.02,64.01 0 top
U17  3.3V  [SOT23-5]  68.83,29.72 270 top
U18  MCP73831  [SOT23-5]  65.53,35.05 90 top
U19  W25QXX128MBIT  [WSON-8-6X5-SKINNY_CENTERPAD]  88.52,42.29 0 bottom
U20  RP2040  [QFN-56]  89.03,52.7 270 top
U21  MAX17048  [DFN-8]  84.33,37.34 0 top
U22  WS2812-2020  [WS2812-2020]  88.39,64.01 0 top
U23  3.3V  [SOT23-5]  92.2,29.72 270 top
U24  MCP73831  [SOT23-5]  88.9,35.05 90 top
U25  W25QXX128MBIT  [WSON-8-6X5-SKINNY_CENTERPAD]  18.41,103.76 0 bottom
U26  RP2040  [QFN-56]  18.92,114.17 270 top
U27  MAX17048  [DFN-8]  14.22,98.81 0 top
U28  WS2812-2020  [WS2812-2020]  18.29,125.48 0 top
U29  3.3V  [SOT23-5]  22.1,91.19 270 top
U30  MCP73831  [SOT23-5]  18.8,96.52 90 top
U31  W25QXX128MBIT  [WSON-8-6X5-SKINNY_CENTERPAD]  41.78,103.76 0 bottom
U32  RP2040  [QFN-56]  42.29,114.17 270 top
U33  MAX17048  [DFN-8]  37.59,98.81 0 top
U34  WS2812-2020  [WS2812-2020]  41.66,125.48 0 top
U35  3.3V  [SOT23-5]  45.47,91.19 270 top
U36  MCP73831  [SOT23-5]  42.16,96.52 90 top
U37  W25QXX128MBIT  [WSON-8-6X5-SKINNY_CENTERPAD]  65.15,103.76 0 bottom
U38  RP2040  [QFN-56]  65.66,114.17 270 top
U39  MAX17048  [DFN-8]  60.96,98.81 0 top
U40  WS2812-2020  [WS2812-2020]  65.02,125.48 0 top
U41  3.3V  [SOT23-5]  68.83,91.19 270 top
U42  MCP73831  [SOT23-5]  65.53,96.52 90 top
U43  W25QXX128MBIT  [WSON-8-6X5-SKINNY_CENTERPAD]  88.52,103.76 0 bottom
U44  RP2040  [QFN-56]  89.03,114.17 270 top
U45  MAX17048  [DFN-8]  84.33,98.81 0 top
U46  WS2812-2020  [WS2812-2020]  88.39,125.48 0 top
U47  3.3V  [SOT23-5]  92.2,91.19 270 top
U48  MCP73831  [SOT23-5]  88.9,96.52 90 top
U49  W25QXX128MBIT  [WSON-8-6X5-SKINNY_CENTERPAD]  18.41,165.23 0 bottom
U50  RP2040  [QFN-56]  18.92,175.64 270 top
U51  MAX17048  [DFN-8]  14.22,160.27 0 top
U52  WS2812-2020  [WS2812-2020]  18.29,186.94 0 top
U53  3.3V  [SOT23-5]  22.1,152.65 270 top
U54  MCP73831  [SOT23-5]  18.8,157.99 90 top
U55  W25QXX128MBIT  [WSON-8-6X5-SKINNY_CENTERPAD]  41.78,165.23 0 bottom
U56  RP2040  [QFN-56]  42.29,175.64 270 top
U57  MAX17048  [DFN-8]  37.59,160.27 0 top
U58  WS2812-2020  [WS2812-2020]  41.66,186.94 0 top
U59  3.3V  [SOT23-5]  45.47,152.65 270 top
U60  MCP73831  [SOT23-5]  42.16,157.99 90 top
U61  W25QXX128MBIT  [WSON-8-6X5-SKINNY_CENTERPAD]  65.15,165.23 0 bottom
U62  RP2040  [QFN-56]  65.66,175.64 270 top
U63  MAX17048  [DFN-8]  60.96,160.27 0 top
U64  WS2812-2020  [WS2812-2020]  65.02,186.94 0 top
U65  3.3V  [SOT23-5]  68.83,152.65 270 top
U66  MCP73831  [SOT23-5]  65.53,157.99 90 top
U67  W25QXX128MBIT  [WSON-8-6X5-SKINNY_CENTERPAD]  88.52,165.23 0 bottom
U68  RP2040  [QFN-56]  89.03,175.64 270 top
U69  MAX17048  [DFN-8]  84.33,160.27 0 top
U70  WS2812-2020  [WS2812-2020]  88.39,186.94 0 top
U71  3.3V  [SOT23-5]  92.2,152.65 270 top
U72  MCP73831  [SOT23-5]  88.9,157.99 90 top
U$1  [#_16#0]  8.51,41.15 0 top
U$2  [#_17#0]  8.51,43.69 0 top
U$3  [#_18#0]  8.51,46.23 0 top
U$4  [#_19#0]  8.51,48.77 0 top
U$5  [#_20#0]  8.51,51.31 0 top
U$6  [#_21#0]  8.51,53.85 0 top
U$7  [#_22#0]  8.51,56.39 0 top
U$8  [#_SCL#7#23#0]  8.51,58.93 0 top
U$9  [#_SDA#6#0]  8.51,61.47 0 top
U$10  [#WS2812_#0]  28.07,61.47 0 top
U$11  [#0#TX_#0]  28.07,58.93 0 top
U$12  [#1#RX_#0]  28.07,56.39 0 top
U$13  [#4#CIPO_#0]  28.07,53.85 0 top
U$14  [#3#COPI_#0]  28.07,51.31 0 top
U$15  [#2#SCK_#0]  28.07,48.77 0 top
U$16  [PWR0]  25.91,14.48 0 top
U$17  [#I�C#0]  13.49,18.92 90 bottom
U$18  [#29#ADC3_#0]  28.07,41.15 0 top
U$19  [#28#ADC2_#0]  28.07,38.61 0 top
U$20  [#27#ADC1_#0]  28.07,36.07 0 top
U$21  [#26#ADC0_#0]  28.07,33.53 0 top
U$22  [#_VUSB#0]  8.51,38.61 0 top
U$23  [#_EN#0]  8.51,36.07 0 top
U$24  [#_VBATT#0]  8.51,33.53 0 top
U$25  [#GND_#0]  28.07,30.99 0 top
U$26  [#AREF_#0]  28.07,28.45 0 top
U$27  [#3#3V_#0]  28.07,25.91 0 top
U$28  [##RESET##0]  27.94,23.37 0 top
U$29  [RP2040_10]  23.24,42.67 0 top
U$30  [RP2040_20]  12.7,23.88 0 bottom
U$31  [#_16#0]  31.88,41.15 0 top
U$32  [SFE_LOGO_NAME_FLAME_.1]  15.88,28.32 0 bottom
U$33  [#SCL_#0]  8.51,58.93 0 bottom
U$34  [#SDA_#0]  8.51,61.47 0 bottom
U$35  [#_#RESET##0]  28.07,23.37 0 bottom
U$36  [#_3#3V#0]  28.07,25.91 0 bottom
U$37  [#_AREF#0]  28.07,28.45 0 bottom
U$38  [#_GND#0]  28.07,30.99 0 bottom
U$39  [#_26#ADC0#0]  28.07,33.53 0 bottom
U$40  [#_27#ADC1#0]  28.07,36.07 0 bottom
U$41  [#_28#ADC2#0]  28.07,38.61 0 bottom
U$42  [#_29#ADC3#0]  28.07,41.15 0 bottom
U$43  [#_17#0]  31.88,43.69 0 top
U$44  [THING_PLUS0]  13.21,26.54 0 bottom
U$45  [SFE_LOGO_NAME_.1]  21.21,45.95 0 top
U$46  [#_18#0]  31.88,46.23 0 top
U$47  [THING_PLUS_0]  23.24,44.32 0 top
U$48  [#_19#0]  31.88,48.77 0 top
U$49  [#_20#0]  31.88,51.31 0 top
U$50  [#_21#0]  31.88,53.85 0 top
U$51  [#_22#0]  31.88,56.39 0 top
U$52  [#WS2812_#0]  51.43,61.47 0 top
U$53  [#0#TX_#0]  51.43,58.93 0 top
U$54  [250]  18.29,43.69 0 top
U$55  [CHARGE0]  18.29,41.15 0 top
U$56  [BOOT0]  18.29,23.37 0 top
U$57  [#22_#0]  8.51,56.39 0 bottom
U$58  [#21_#0]  8.51,53.85 0 bottom
U$59  [#20_#0]  8.51,51.31 0 bottom
U$60  [#WS2812#0]  18.29,66.04 0 top
U$61  [#19_#0]  8.51,48.77 0 bottom
U$62  [#18_#0]  8.51,46.23 0 bottom
U$63  [#17_#0]  8.51,43.69 0 bottom
U$64  [QWIIC_4MM]  13.59,18.8 270 top
U$65  [#16_#0]  8.51,41.15 0 bottom
U$66  [#VUSB_#0]  8.51,38.61 0 bottom
U$67  [#EN_#0]  8.51,36.07 0 bottom
U$68  [#VBATT_#0]  8.51,33.53 0 bottom
U$69  [#_NC#0]  28.07,43.69 0 bottom
U$70  [#_NC#0]  28.07,46.23 0 bottom
U$71  [#1#RX_#0]  51.43,56.39 0 top
U$72  [#4#CIPO_#0]  51.43,53.85 0 top
U$73  [#3#COPI_#0]  51.43,51.31 0 top
U$74  [#2#SCK_#0]  51.43,48.77 0 top
U$75  [#_SCL#7#23#0]  31.88,58.93 0 top
U$76  [#_SDA#6#0]  31.88,61.47 0 top
U$77  [#29#ADC3_#0]  51.43,41.15 0 top
U$78  [#28#ADC2_#0]  51.43,38.61 0 top
U$79  [#27#ADC1_#0]  51.43,36.07 0 top
U$80  [#26#ADC0_#0]  51.43,33.53 0 top
U$81  [#_VUSB#0]  31.88,38.61 0 top
U$82  [#_EN#0]  31.88,36.07 0 top
U$83  [#_VBATT#0]  31.88,33.53 0 top
U$84  [#GND_#0]  51.43,30.99 0 top
U$85  [#AREF_#0]  51.43,28.45 0 top
U$86  [#3#3V_#0]  51.43,25.91 0 top
U$87  [##RESET##0]  51.31,23.37 0 top
U$88  [#WS2812#0]  41.66,66.04 0 top
U$89  [QWIIC_4MM]  36.96,18.8 270 top
U$90  [SFE_LOGO_NAME_FLAME_.1]  39.24,28.32 0 bottom
U$91  [250]  41.66,43.69 0 top
U$92  [CHARGE0]  41.66,41.15 0 top
U$93  [BOOT0]  41.66,23.37 0 top
U$94  [#22_#0]  31.88,56.39 0 bottom
U$95  [#21_#0]  31.88,53.85 0 bottom
U$96  [#20_#0]  31.88,51.31 0 bottom